# Altium PCB LTE_GPS_433_V1.0.PcbDoc (part 1 of 2)
Units mil, origin at the board's own origin, x right, y up, seen from the top; angles counter-clockwise.
Board outline 3937.01 x 2362.2 mil, 4 copper layers (Top Layer, GND, POWER, Bottom Layer); 259 components, 188 nets, 896 pads, 488 vias.
Unrouted connection lines stored in the file: 33.
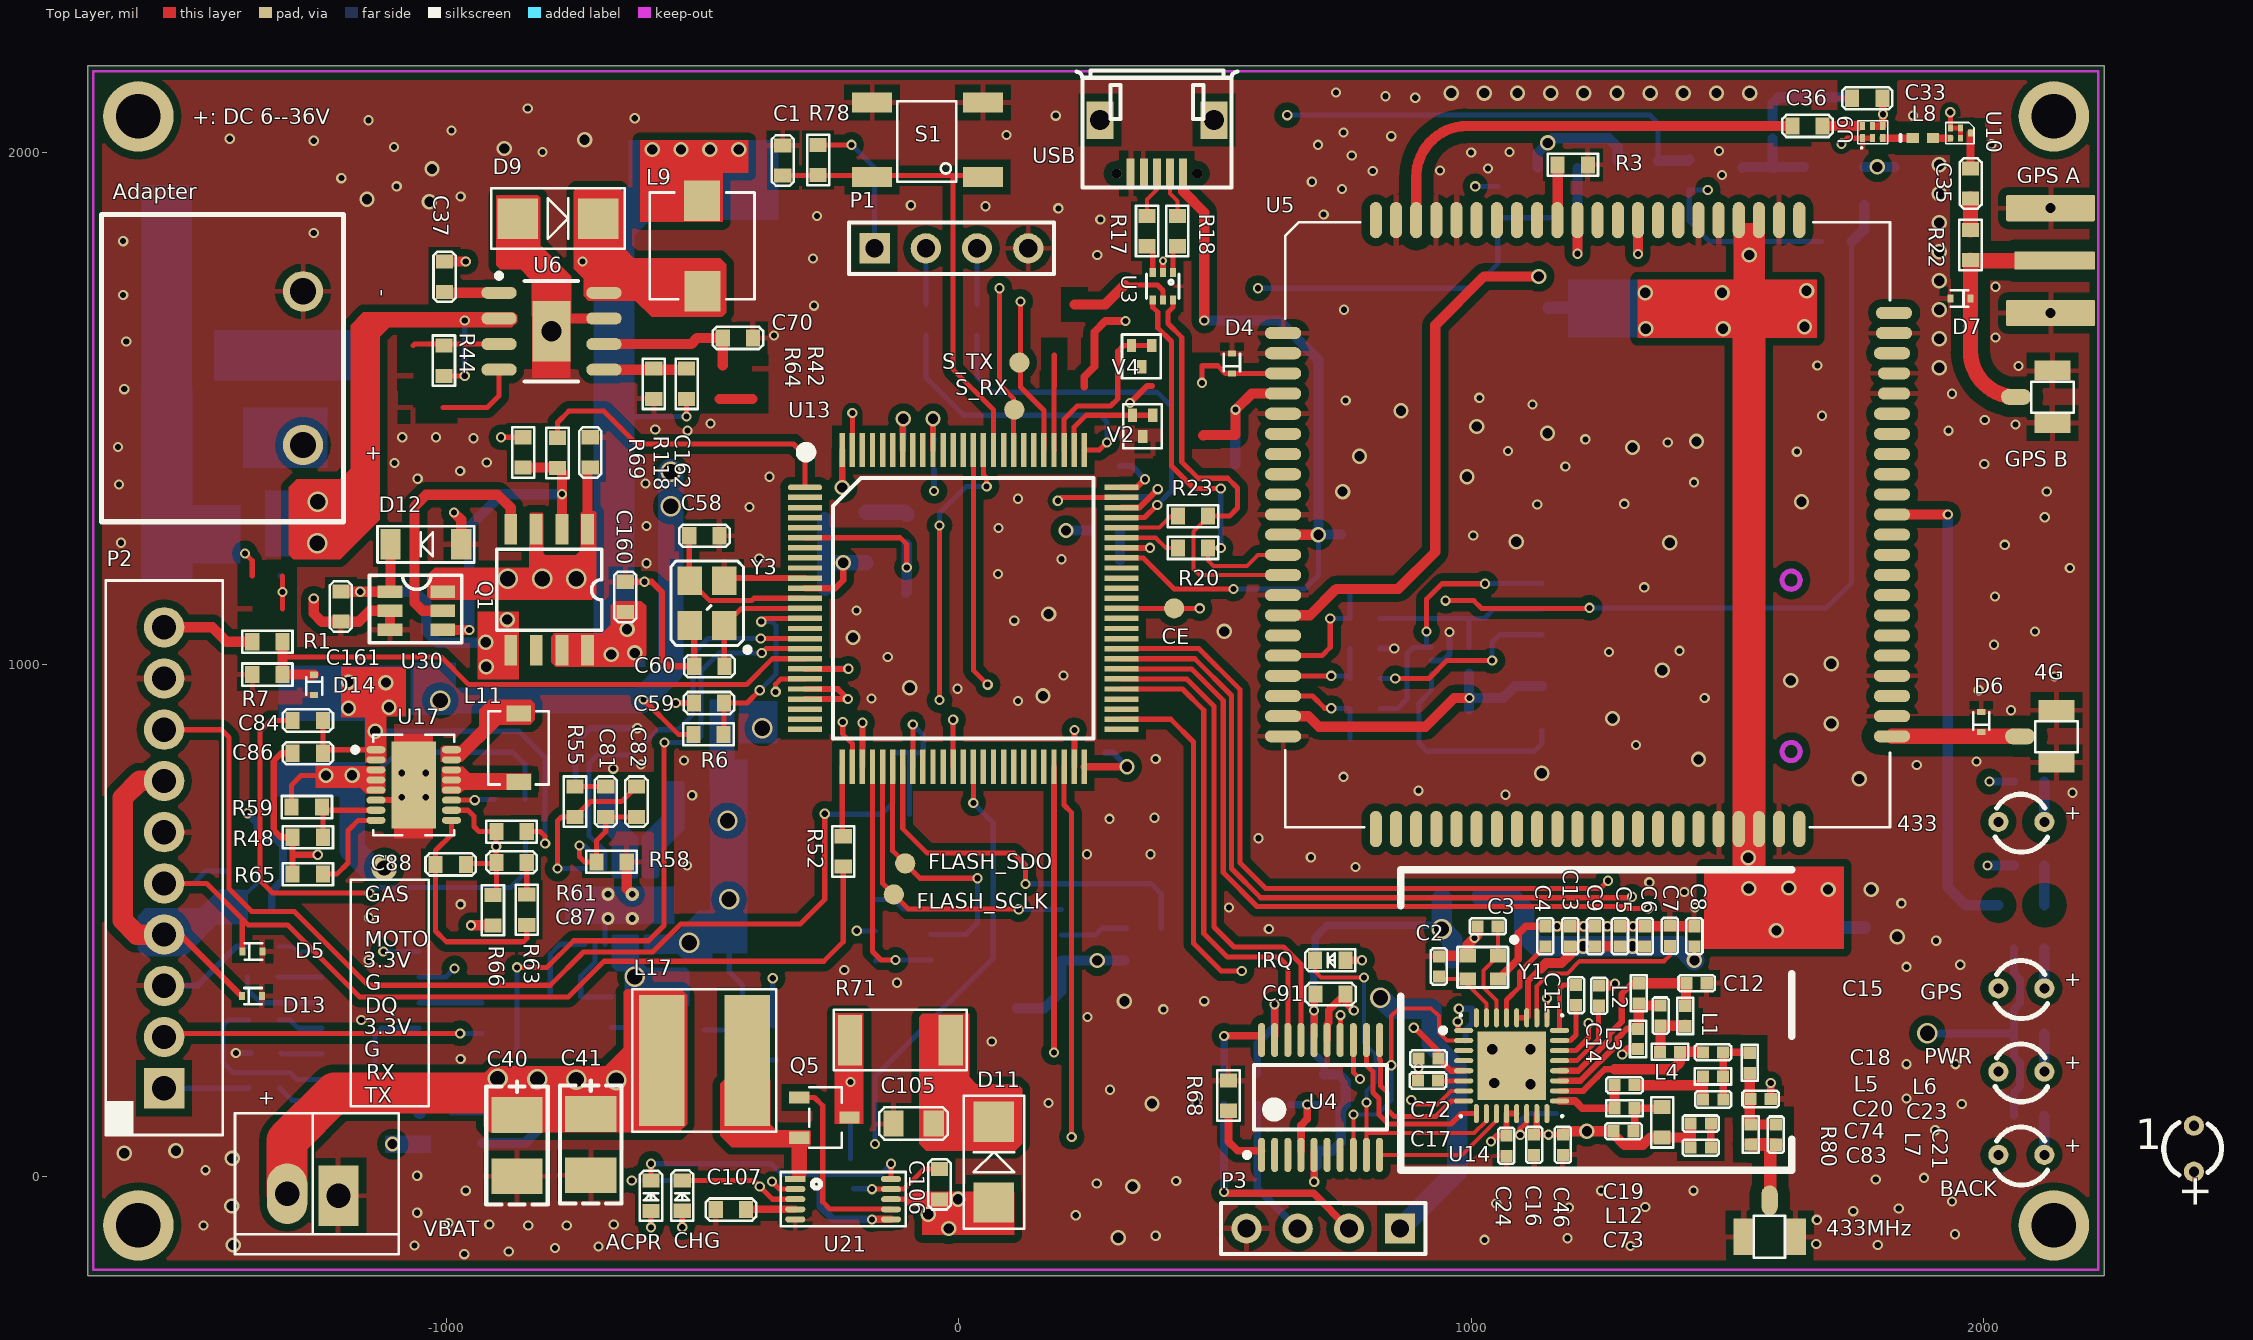
[diagram p0: Top Layer view]
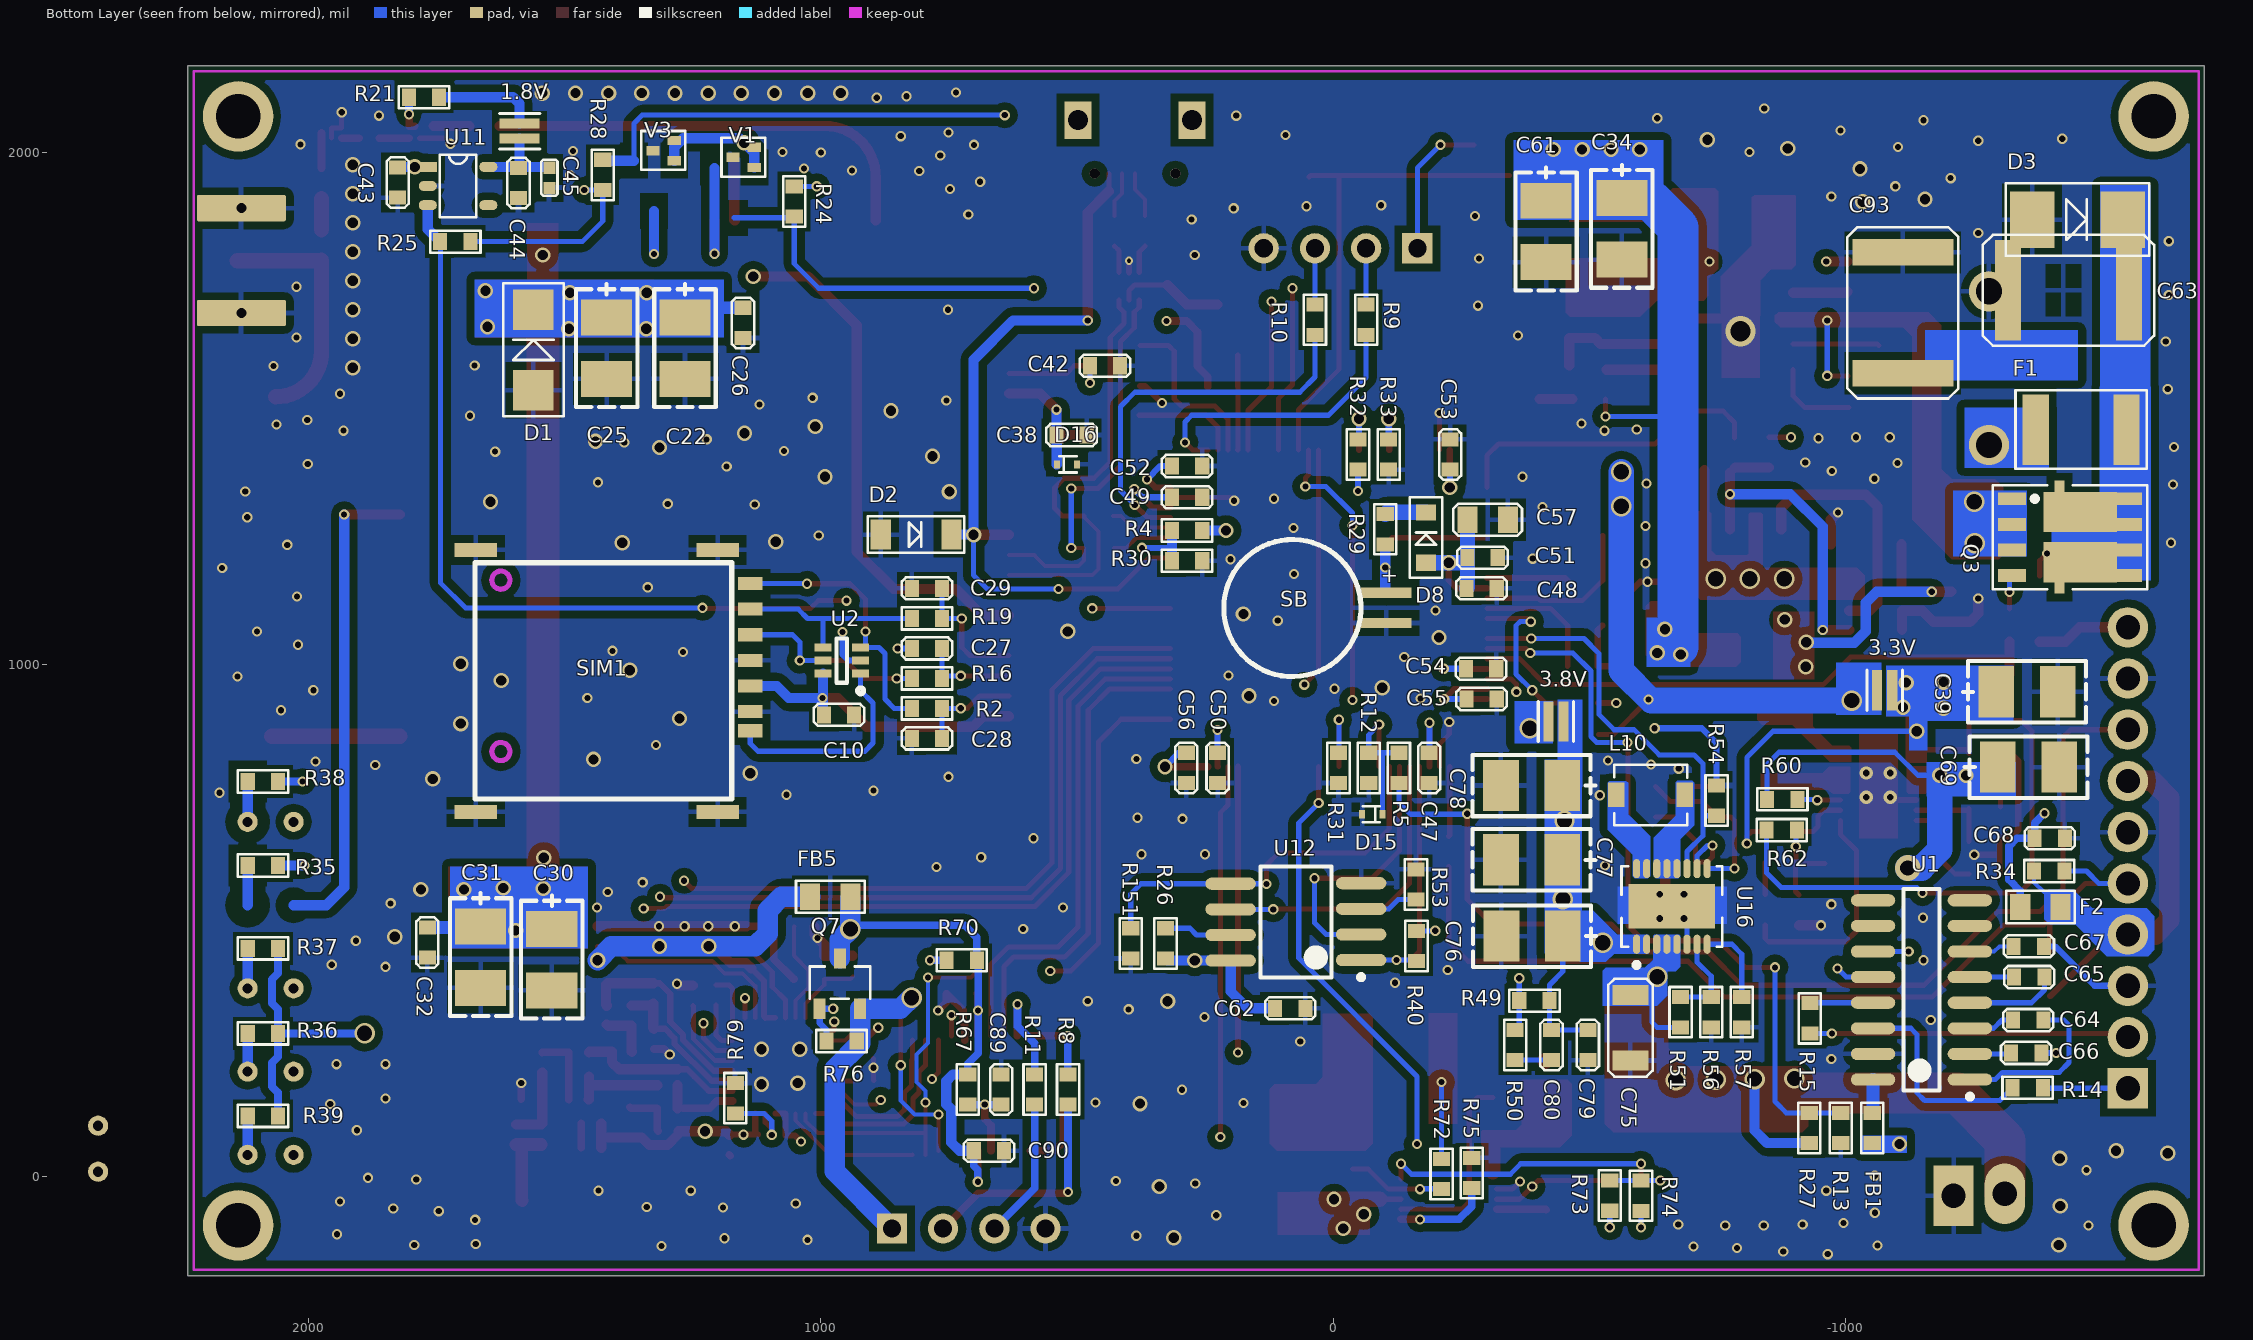
[diagram p1: Bottom Layer view, seen from below]
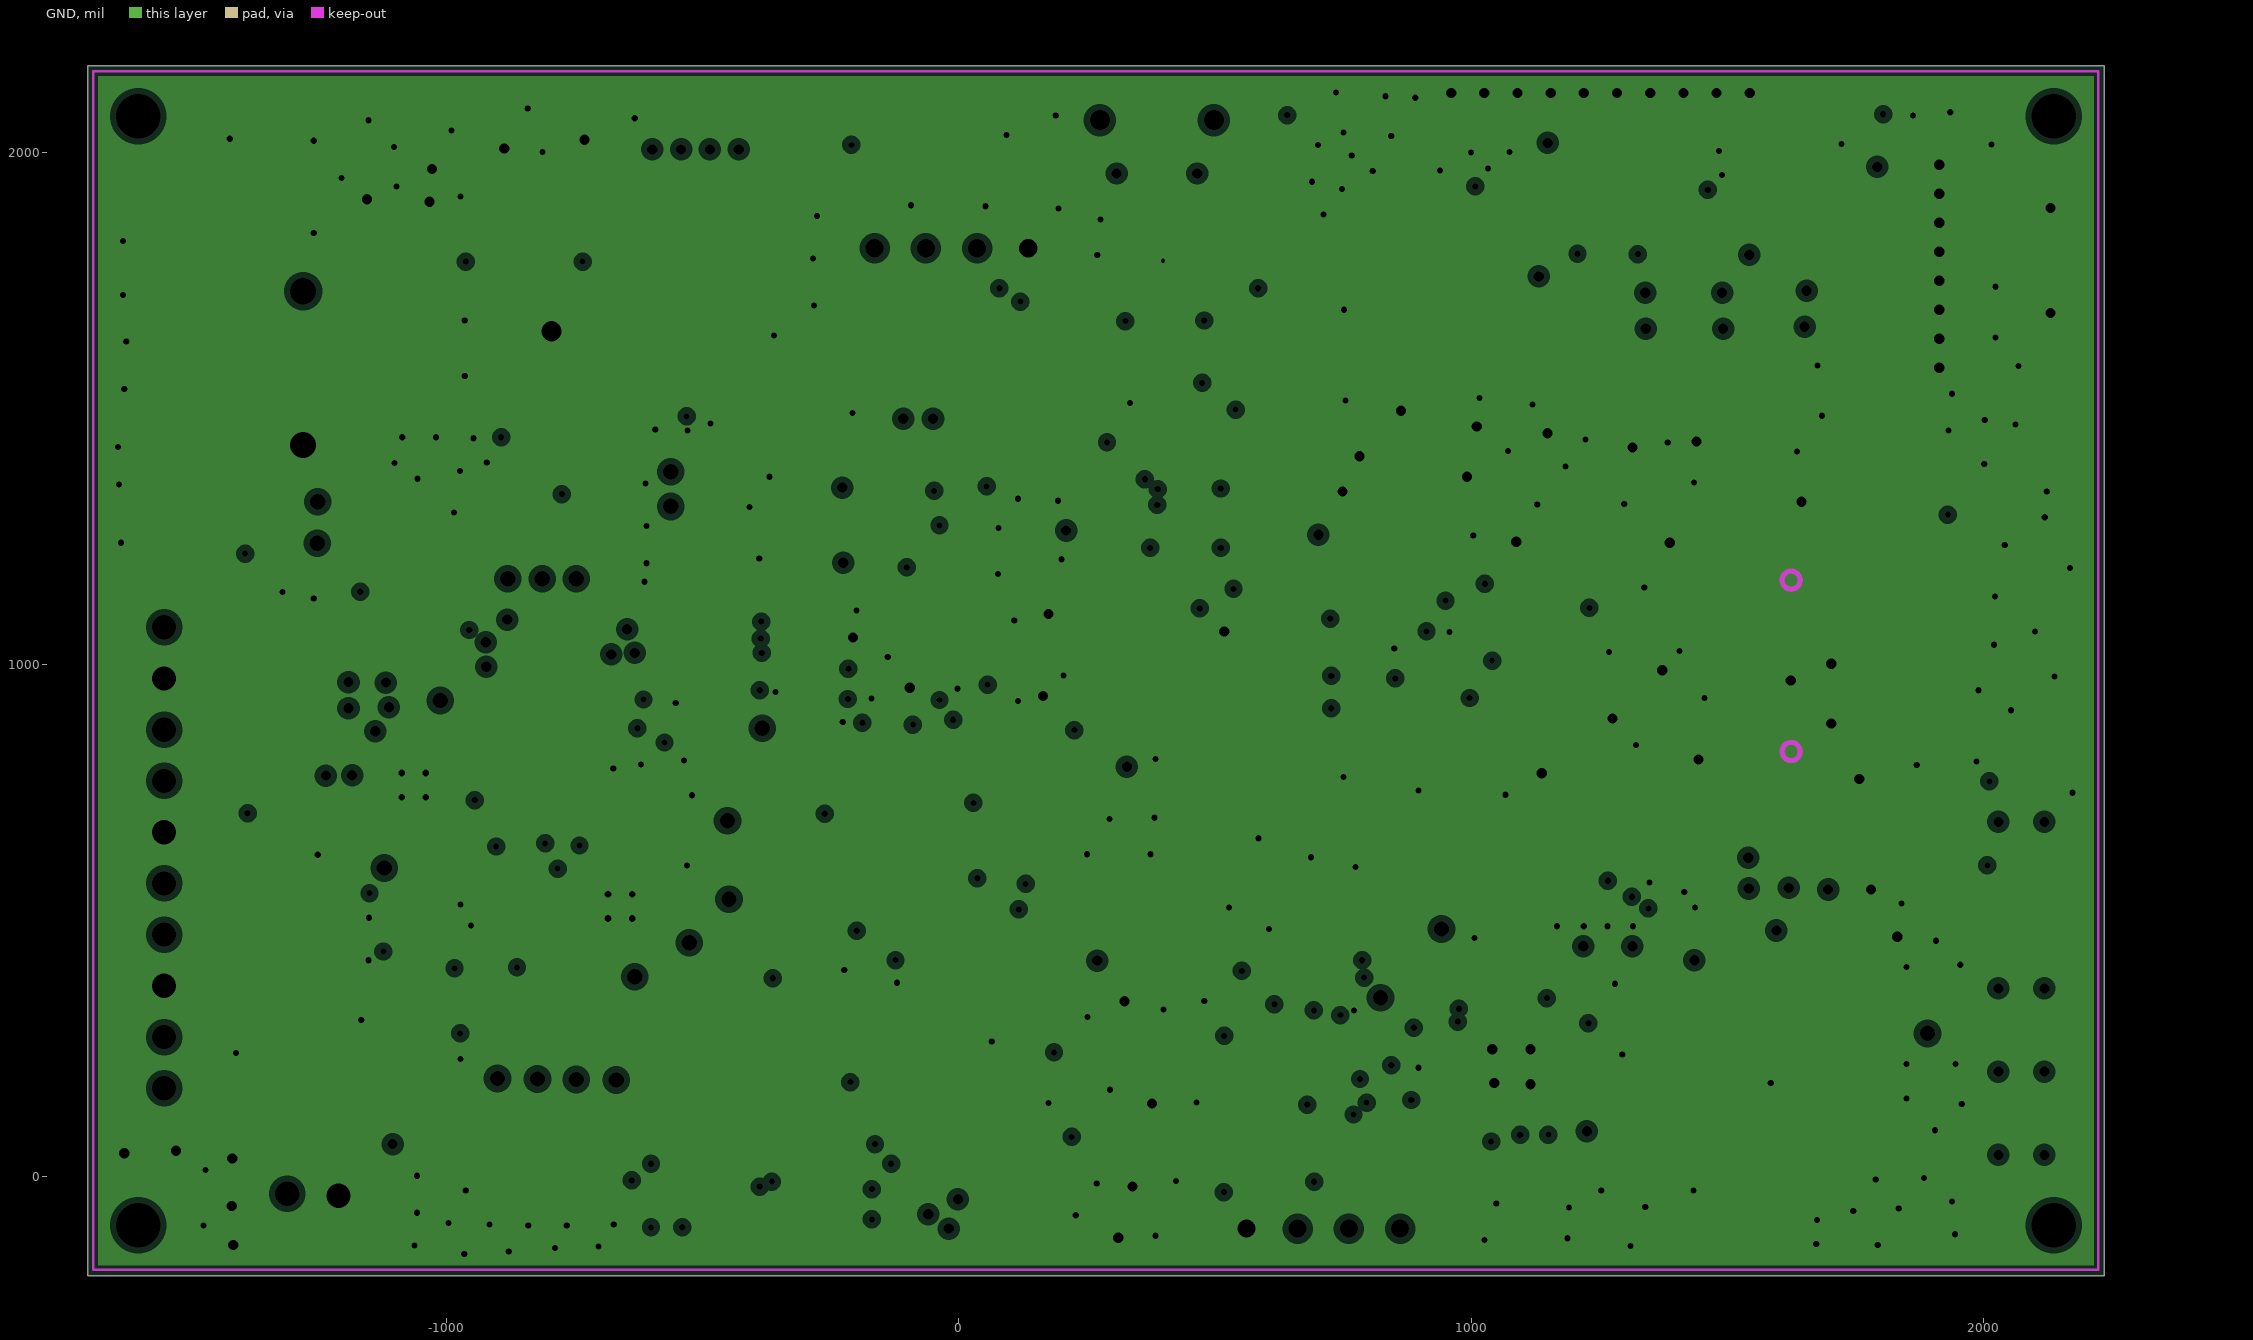
[diagram p2: GND, clearances drawn from the general rule]
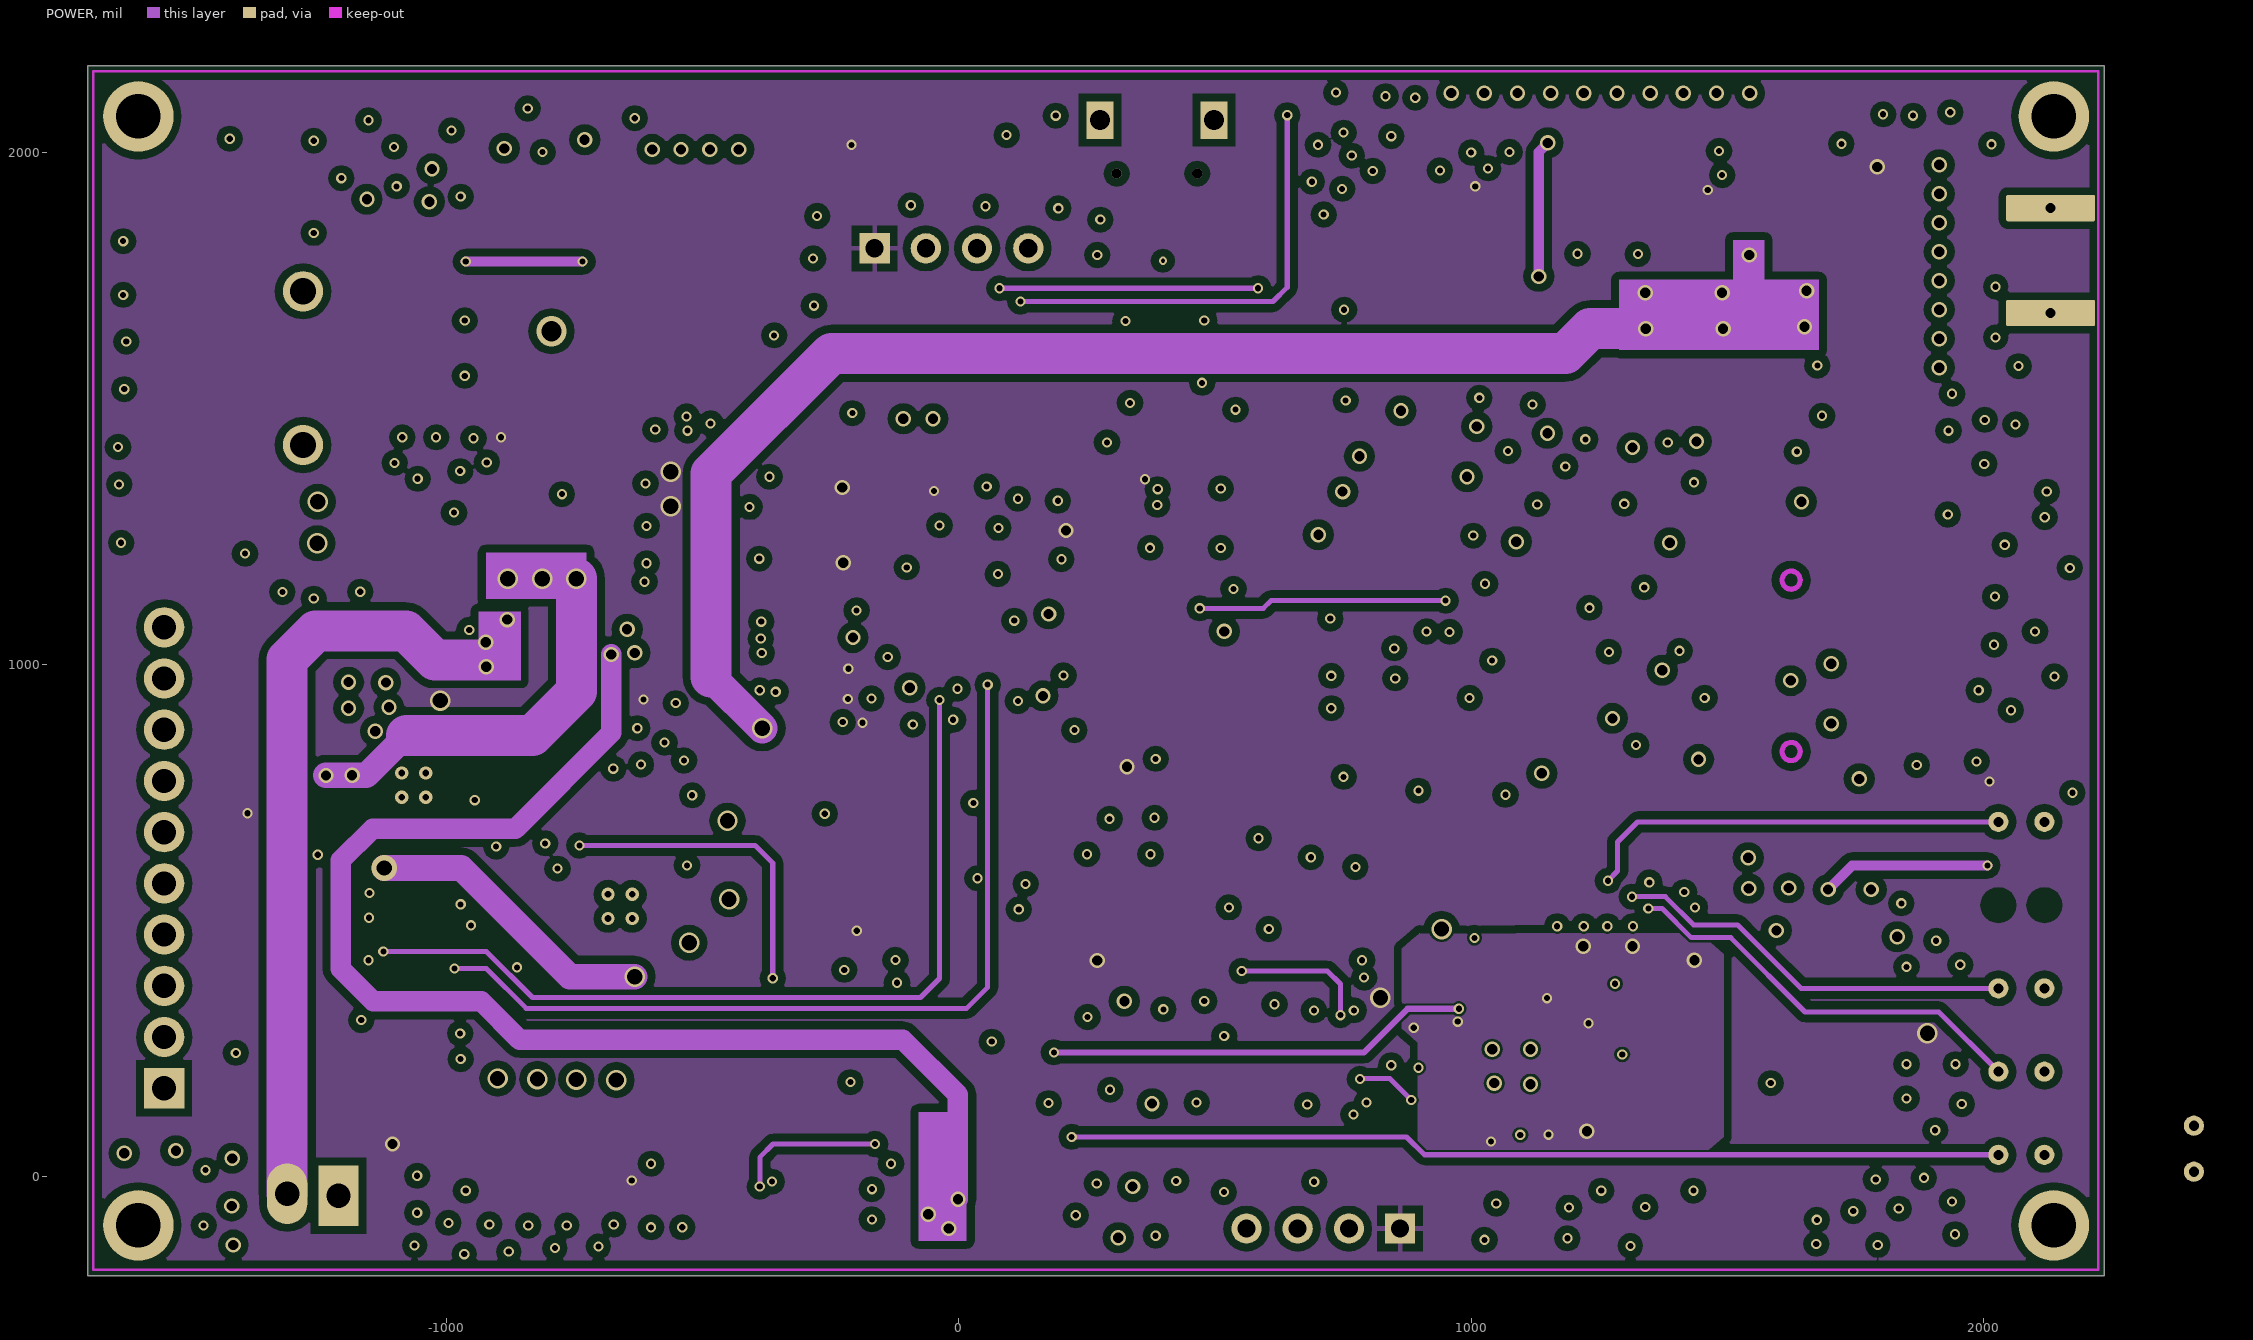
[diagram p3: POWER]

## Layer stack, top to bottom
Top Layer: signal copper 1.4
Dielectric: core 12.6, FR-4, Dk 4.8
GND: plane copper 1.4, net GND
Dielectric: prepreg 12.6, FR-4, Dk 4.8
POWER: signal copper 1.4
Dielectric: core 12.6, FR-4, Dk 4.8
Bottom Layer: signal copper 1.4

## Board outline
-1700.68,-193.2 -1700.68,2169 2236.32,2169 2236.32,-193.2

## Design rules (kind name [scope] priority, off if disabled: settings)
Clearance Clearance_2 [All] p1: gap=5
Clearance rf [InNetClass('RF')] p2: gap=23.62
Clearance Clearance_1 [InNet('VCC_MCU_3.3V')] p3: gap=15
Clearance [InPolygon And InNet(GND)] p4: gap=15
DiffPairsRouting [All] p1: maxlimit=10 minlimit=10 mostfreqgap=10 maxuncoupledlength=500
MinimumSolderMaskSliver [All] p1: minsoldermaskwidth=1
PlaneClearance [All] p1: clearance=12
PlaneConnect [All] p1: planeconnectstyle=Relief reliefexpansion=20 reliefentries=4 reliefconductorwidth=10 reliefairgap=10
PolygonConnect [IsVia] p1: connectstyle=Direct reliefconductorwidth=10 reliefentries=4 polygonreliefangle="90 Angle"
PolygonConnect PolygonConnect_1 [All] p2: connectstyle=Relief reliefconductorwidth=10 reliefentries=4 polygonreliefangle="90 Angle"
RoutingVias [All] p1: holewidth=28 width=50 viastyle="Through Hole" minholewidth=28 minwidth=50 maxholewidth=28 maxwidth=50
SilkToSilkClearance [All] p1: silktosilkclearance=1
SilkscreenOverComponentPads [All] p1: minsilkscreentomaskgap=0
SolderMaskExpansion [All] p1: expansion=4
Width [All] p1: maxlimit=200 minlimit=8 preferedwidth=10
22 further rules are at their usual default settings.

## Classes and differential pairs
component class RF_433MHz: 433MHz C2 C3 C4 C5 C6 C7 C8 C9 C11 C12 C13 C14 C15 C16 C17 C18 C19 C20 C21 C23 C24 C46 C72 C73 C74 C83 C89 C90 C91 D10 FB5 IRQ L1 L2 L3 L4 L5 L6 L7 L12 Q7 R67 R68 R70 R76 R79 R80 U4 U14 U15 Y1
component class POWER_IN: 3.3V 3.8V ACPR C34 C37 C39 C40 C41 C61 C63 C69 C70 C75 C76 C77 C78 C79 C80 C81 C82 C84 C86 C87 C88 C93 C105 C106 C107 C160 C161 C162 C? CHG D3 D9 D11 D12 D? F1 L9 L10 L11 L17 L? NET7 NET8 Q1 Q3 Q5 R13 R27 R42 R44 R48 R49 R50 R51 R54 R55 R56 R57 R58 R59 R60 R61 R62 R63 R64 R65 R66 R69 R71 R72 R73 R74 R75 R118 R? T7 T8 U6 U16 U17 U21 U30
component class MCU: 1 433 BACK C47 C48 C49 C50 C51 C52 C53 C54 C55 C56 C57 C58 C59 C60 C62 D8 FLASH_SCLK FLASH_SDO GPS PWR R4 R6 R20 R23 R26 R29 R30 R31 R32 R33 R35 R36 R37 R38 R39 R40 R52 R53 R151 SB U12 U13 Y3
component class LTE: 1.8V 3G_ANT 4G C10 C22 C25 C26 C27 C28 C29 C30 C31 C32 C33 C35 C36 C38 C42 C43 C44 C45 CE D1 D2 D4 D5 D6 D7 "GPS A" "GPS B" L8 R2 R3 R16 R19 R21 R22 R24 R25 R28 S_RX S_TX SIM1 T1 T3 T4 T5 U2 U5 U7 U8 U9 U10 U11 V1 V2 V3 V4
component class Interface: Adapter C1 C64 C65 C66 C67 C68 D5 D13 D14 D15 F2 FB1 P1 P2 P3 P6 R1 R5 R7 R8 R9 R10 R11 R12 R14 R15 R17 R18 R34 R78 S1 U1 U3 USB VBAT
differential pair USB_D: +USB_D_P -USB_D_N

## Components (designator, comment, footprint, x,y, rotation, side; value= is the part's Value field where it differs from the comment)
1 "LED0" LED_DIP_3mm 2411.32,10 r90 top
1.8V "TEST_P" "TP_High PWR" 1588.32,2027 r90 bottom (schematic designator T5)
3.3V "TEST_P" "TP_High PWR" -1092,950 r0 bottom (schematic designator T8)
3.8V "3.8V" "TP_High PWR" -450,889 r0 bottom (schematic designator T7)
4G "IPX" ECT8180001581 2072,860.1 r270 top
433 "LED0" LED_DIP_3mm 2119.32,693 r180 top (schematic designator NET5)
433MHz "IPX" ECT8180001581 1583,-46 r180 top (schematic designator U15)
ACPR "LED0" 0603LED -601.35,-66.45 r90 top (schematic designator NET8)
Adapter "Header 2" KF7.62-2P -1280.68,1729 r270 top (schematic designator P5)
BACK "BACK" LED_DIP_3mm 2119.32,43 r180 top (schematic designator NET6)
C1 "0.1uF/50V" 0603C -344,1955 r90 top
C2 "15pF/50V" 0402C 937,391 r90 top
C3 "15pF/50V" 0402C 1052,489 r180 top
C4 "47nF/50V" 0402C 1145,450 r90 top
C5 "47nF/50V" 0402C 1290.5,450 r90 top
C6 "47nF/50V" 0402C 1339,450 r90 top
C7 "47nF/50V" 0402C 1388,451 r90 top
C8 "47nF/50V" 0402C 1436,450 r90 top
C9 "47nF/50V" 0402C 1242,489.37 r270 top
C10 "0.1uF/6.3V" 0603C 935,902 r0 bottom
C11 "1.8nF/50V" 0402C 1205,335 r90 top
C12 "5.1pF/50V" 0402C 1460,378 r180 top
C13 "10nF/50V" 0402C 1193.5,450 r90 top
C14 "10nF/50V" 0402C 1250,334 r90 top
C15 "5.1pF/50V" 0402C 1370,295 r90 top
C16 "47nF/50V" 0402C 1123,43 r90 top
C17 "220nF/50V" 0402C 896,188 r0 top
C18 "5.1pF/50V" 0402C 1492,243 r180 top
C19 "39pF/50V" 0402C 1280,179 r0 top
C20 "2.2pF/50V" 0402C 1453,151 r0 top
C21 "2.2pF/50V" 0402C 1595,102 r270 top
C22 "100uF/10V" 1210E 1265.32,1618 r270 bottom
C23 "6.2pF/50V" 0402C 1585,152 r180 top
C24 "47nF/50V" 0402C 1068.75,41 r90 top
C25 "100uF/10V" 1210E 1418.32,1618 r270 bottom
C26 "1uF/50V" 0603C 1152,1697 r270 bottom
C27 "22pF/6.3V" 0603C 763.26,1031.8 r0 bottom
C28 "22pF/6.3V" 0603C 763.26,856 r0 bottom
C29 "22pF/6.3V" 0603C 763.26,1149 r0 bottom
C30 "100uF/10V" 1210E 1525.32,424 r270 bottom
C31 "100uF/10V" 1210E 1664.32,429 r270 bottom
C32 "0.1uF/50V" 0603C 1768.32,487 r270 bottom
C33 "10pF" 0603C 1803,2106 r180 top
C34 "100uF/10V" 1210E -564,1851 r270 bottom
C35 "33pF" 0603C 1975.32,1910 r90 top
C36 "33pF" 0603C 1686.32,2052 r180 top
C37 "0.1uF/50V" 0603C -1004.42,1787 r270 top
C38 "0.1uF/6.3V" 0603C 540,1448.37 r180 bottom
C39 "100uF/10V" 1210E -1355,947 r180 bottom
C40 "100uF/10V" 1210E -863,61 r270 top
C41 "100uF/10V" 1210E -719,63 r270 top
C42 "0.1uF/6.3V" 0603C 474.74,1583.63 r180 bottom
C43 "1uF" 0603C 1826.32,1912 r90 bottom
C44 "10uF" 0603C 1590.32,1911 r90 bottom
C45 "1uF" 0402C 1530,1931 r90 bottom
C46 "47nF/50V" 0402C 1179,43 r90 top
C47 "103" 0603C -187.68,828 r270 bottom
C48 "105" 0603C -260.68,1149 r180 bottom
C49 "2.2uF/6.3V" 0603C 255.32,1327 r0 bottom
C50 "2.2uF/6.3V" 0603C 225.32,768.94 r90 bottom
C51 "0.1uF/6.3V" 0603C -321.68,1209 r0 bottom
C52 "0.1uF/6.3V" 0603C 255.32,1388 r0 bottom
C53 "0.1uF/6.3V" 0603C -228.68,1440 r270 bottom
C54 "0.1uF/6.3V" 0603C -318.68,992 r0 bottom
C55 "0.1uF/6.3V" 0603C -319.68,933 r0 bottom
C56 "0.1uF/6.3V" 0603C 286.32,768.94 r90 bottom
C57 "10uF/6.3V" 0805C -262.68,1283 r180 bottom
C58 "10pF/6.3V" 0603C -467.68,1251.81 r180 top
C59 "1uF/6.3V" 0603C -517.68,925 r0 top
C60 "10pF/6.3V" 0603C -517,997 r0 top
C61 "100uF/10V" 1210E -416,1846 r270 bottom
C62 "0.1uF/6.3V" 0603C 54,329 r0 bottom
C63 "100uF/50V" 2220C -1554,1731 r0 bottom
C64 "0.1uF/50V" 0603C -1387,306 r0 bottom
C65 "0.1uF/50V" 0603C -1389,390 r0 bottom
C66 "0.1uF/50V" 0603C -1324,242 r180 bottom
C67 "0.1uF/50V" 0603C -1329,450 r180 bottom
C68 "0.1uF/50V" 0603C -1429,661 r0 bottom
C69 "100uF/10V" 1210E -1358,800 r180 bottom
C70 "22nF/16V" 0603C -461.34,1638 r0 top
C72 "47nF/50V" 0402C 897,231 r0 top
C73 "47nF/50V" 0402C 1278,89 r0 top
C74 "10nF/50V" 0402C 1468,104 r180 top
C75 "68uF/16V" 1206C -580.68,355 r270 bottom
C76 "100uF/10V" 1210E -388.68,470 r0 bottom
C77 "100uF/10V" 1210E -387.68,619 r0 bottom
C78 "100uF/10V" 1210E -387.68,764 r0 bottom
C79 "1uF/16V" 0603C -497.68,287.06 r270 bottom
C80 "33pF/16V" 0603C -426.68,287.06 r270 bottom
C81 "680F/16V" 0603C -689.69,762 r270 top
C82 "10pF/16V" 0603C -629.69,762 r270 top
C83 "100pF/50V" 0402C 1468,57 r180 top
C84 "33pF/16V" 0603C -1242,891 r180 top
C86 "1uF/16V" 0603C -1242,827 r180 top
C87 "680pF/16V" 0603C -844,614 r180 top
C88 "10pF/16V" 0603C -1022,610 r0 top
C89 "0.1uF" 0603C 647.98,141 r90 bottom
C90 "0.1uF" 0603C 642.34,50.8 r0 bottom
C91 "0.1uF" 0603C 755,357 r180 top
C93 "100uF/50V" 2220C -1112.68,1569 r90 bottom
C105 "22uF/16V" 0805C -128,104 r0 top
C106 "0.47uF/16V" 0603C -38,15 r270 top
C107 "0.1uF/16V" 0603C -475,-64 r0 top
C160 "0.1uF" 0603C -651.68,1162 r270 top
C161 "0.1uF/6.3V" 0603C -1207,1084 r90 top
C162 "10uF" 0603C -720.03,1444 r270 top
CE "TP" TPD 420,1110 r0 top (schematic designator T4)
CHG "LED0" 0603LED -540.43,-66.22 r90 top (schematic designator NET7)
D1 "SMAJ5.0CA" SMA 1561.32,1535.84 r90 bottom
D2 "MMSZ5231BT1G" SOD123 883,1254 r180 bottom
D3 "TPSMB43A" SMB -1365,1869 r180 bottom
D4 "ESD9M5.0S-DTVS105" SOD923#1 533,1608 r90 top
D5 "ESD9M5.0S-DTVS105" SOD923#1 -1360,440 r0 top
D6 "ESD9L5" SOD923#2 1996,908 r90 top
D7 "ESD9L5" SOD923#2 1936,1715 r180 top
D8 "RB751V40T1" SOD323 -181.68,1199 r90 bottom
D9 "SS54" SMa -861.68,1871 r0 top
D11 "MBRA340T3G" SMA 68,-50 r90 top
D12 "MMSZ5231BT1G" SOD123 -972,1235 r180 top
D13 "ESD9B3.3ST5G" SOD923#1 -1361,353 r0 top
D14 "ESD9B3.3ST5G" SOD923#1 -1259,941 r270 top
D15 "ESD9B3.3ST5G" SOD923#1 -57,708 r0 bottom
D16 "ESD9M5.0S-DTVS105" SOD923#1 500,1391 r180 bottom
F1 "3A" 1812-F -1372,1459 r180 bottom
F2 "1A" 0805R -1342,527 r180 bottom
FB1 "" 0603R -1053,125 r270 bottom
FB5 "GZ2012D800TF" 0805CZ 1021,547 r180 bottom
FLASH_SCLK "TP" tpd -127.34,551.34 r90 top
FLASH_SDO "TP" tpd -104.93,611.93 r180 top
GPS "LED0" LED_DIP_3mm 2119.32,368 r180 top (schematic designator NET4)
"GPS A" "SMA/142-0711-821" "SMA END LAUNCH JACK RECEPTACLE SHORT" 2139.32,1789 r90 top (schematic designator 3G_ANT)
"GPS B" "IPX" ECT8180001581 2064.32,1523 r270 top (schematic designator U8)
IRQ "LED0" 0603LED 754.43,423 r180 top (schematic designator D10)
L1 "27nH/0402HP-27NXJL" 0402R 1418,334 r270 top
L2 "56nH/0402HP-56NXJL" 0402R 1327.35,378 r270 top
L3 "27nH/0402HP-27NXJL" 0402R 1326,289 r270 top
L4 "15nH/0402HP-15NXJL" 0402R 1408,244 r180 top
L5 "15nH/0402HP-15NXJL" 0402R 1492,196 r180 top
L6 "43nH/0402HP-43NXJL" 0402R 1544,203 r90 top
L7 "22nH/0402HP-22NXJL" 0402R 1546,63 r90 top
L8 "5.6nH" INDC1005AL 1882,2028 r0 top
L9 "SRP5030TA-5R6M" SRP5030T -501.68,1729 r90 top
L10 "IHLP1212BZER2R2M11" IHLP-1212BZ -553,746 r180 bottom
L11 "IHLP1212BZER2R2M11" IHLP-1212BZ -859.68,905 r270 top
L12 "56nH/0402HPH-R56XJL" 0402R 1280,134 r0 top
L17 "CDRH6D28-150NC" CDRH6D23 -580.68,227.05 r90 top
P1 "MHDR1X4" HDR1X4 -164.68,1813 r0 top
P2 "Header 10" 10*2.54MMW -1552,173 r90 top
P3 "MHDR1X4" HDR1X4 861.32,-101 r180 top
PWR "LED0" LED_DIP_3mm 2119.32,205.5 r180 top (schematic designator NET3)
Q1 "FDS9933" FDS9933 -725.68,1265 r270 top
Q3 "Si7370DP" "PowerPAK SO-8" -1326,1324 r180 bottom
Q5 "ZXM61P03FTA" SOT23-3 -312,155 r180 top
Q7 "ZXM61P03FTA" SOT23-3 1002.32,328.06 r270 bottom
R1 "20K/1%" 0603R -1321,1044.76 r180 top
R2 "10R/5%" 0603R 822.32,914.6 r180 bottom
R3 "4.7K" 0603R 1228,1976 r180 top
R4 "10K" 0603R 314.37,1262 r180 bottom
R5 "100K/1%" 0603R -128.69,828 r270 bottom
R6 "10K" 0603R -459.68,864 r180 top
R7 "20K/1%" 0603R -1380.06,980.64 r0 top
R8 "22R" 0603R 517.32,200.06 r270 bottom
R9 "22R" 0603R -64.68,1644 r90 bottom
R10 "22R" 0603R 35.32,1644 r90 bottom
R11 "22R" 0603R 582.65,200.06 r270 bottom
R12 "30K/1%" 0603R -69.68,768.94 r90 bottom
R13 "158K/1%" 0603R -991.5,65.94 r90 bottom
R14 "1K" 0603R -1386,174 r0 bottom
R15 "1K" 0603R -931,280 r90 bottom
R16 "10R/5%" 0603R 822.32,973.2 r180 bottom
R17 "22R" 0603R 367.32,1876 r270 top
R18 "22R" 0603R 426.32,1876 r270 top
R19 "10R/5%" 0603R 822.32,1090.4 r180 bottom
R20 "0" 0603R 427.32,1228 r0 top
R21 "10R/5%" 0603R 1804.32,2108 r180 bottom
R22 "0" 0603R 1975,1790 r90 top
R23 "0" 0603R 427.32,1290 r0 top
R24 "10K" 0603R 1052,1934 r270 bottom
R25 "10K" 0603R 1743.32,1826 r180 bottom
R26 "100K" 0603R 327,426.26 r90 bottom
R27 "158K/1%" 0603R -930,125 r270 bottom
R28 "10K" 0603R 1426,1986 r270 bottom
R29 "1K" 0603R -102,1294 r270 bottom
R30 "10K" 0603R 314.37,1203 r180 bottom
R31 "10K" 0603R -10.69,828 r270 bottom
R32 "10K" 0603R -48.68,1440 r270 bottom
R33 "10K" 0603R -108.68,1440 r270 bottom
R34 "4.7K" 0603R -1428,597 r0 bottom
R35 "1K" 0603R 2060,608 r0 bottom
R36 "1K" 0603R 2060,280 r0 bottom
R37 "1K" 0603R 2060,446 r0 bottom
R38 "1K" 0603R 2060,772 r0 bottom
R39 "1K" 0603R 2060,119 r0 bottom
R40 "100K" 0603R -163,421.32 r90 bottom
R42 "100K/1%" 0603R -531.8,1578 r270 top
R44 "84.5K" 0603R -1005.68,1564 r90 top
R48 "10K/NC" 0603R -1242,663 r180 top
R49 "665K/1%" 0603R -363.68,344 r180 bottom
R50 "10K/1%" 0603R -355.68,228 r90 bottom
R51 "1M" 0603R -678.69,291.94 r90 bottom
R52 "100" 0603R -226,665 r270 top
R53 "100K" 0603R -162,600.32 r270 bottom
R54 "10K" 0603R -749,705 r90 bottom
R55 "10K/1%" 0603R -749.68,762 r270 top
R56 "10K/NC" 0603R -738.43,351 r270 bottom
R57 "90.9K/1%" 0603R -798.18,351 r270 bottom
R58 "124K/1%" 0603R -648.68,615 r180 top
R59 "1M" 0603R -1303,722 r0 top
R60 "1M" 0603R -847.68,737 r180 bottom
R61 "715K/1%" 0603R -903.06,674 r0 top
R62 "10K/1%" 0603R -846.68,677 r180 bottom
R63 "10K/1%" 0603R -844,551 r270 top
R64 "17.8K/1%" 0603R -596.03,1578 r270 top
R65 "90.9K/1%" 0603R -1242,591 r180 top
R66 "158K/1%" 0603R -910,491 r90 top
R67 "10K" 0603R 713.31,200.06 r270 bottom
R68 "10K" 0603R 526.32,129 r90 top
R69 "1M" 0603R -851.03,1384.94 r90 top
R70 "1K" 0603R 695.37,423 r0 bottom
R71 "0.082/1/4W" 2010R -213,267 r0 top
R72 "4.7/1%" 0603R -212,35 r270 bottom
R73 "1K" 0603R -540.43,-7.16 r270 bottom
R74 "1K" 0603R -601.35,-7.39 r270 bottom
R75 "19.6K" 0603R -271,37 r270 bottom
R76 "10K" 0603R 989,265 r180 bottom
R78 "10K" 0603R -275,2015 r270 top
R79 "56K/1%" 0603R 1167,124 r90 bottom
R80 "56K/1%" 0603R 1373,136 r270 top
R118 "0" 0603R -784,1384 r90 top
R151 "100K" 0603R 395,485.32 r270 bottom
S1 "SW-PB" KEY_SMT_4*4 -169.68,1952 r90 top
S_RX "TP" TPD 108,1498 r0 top (schematic designator T1)
S_TX "TP" TPD 118,1590 r0 top (schematic designator T3)
SB "SBatery" MS621FE -103.68,1111 r180 bottom
SIM1 "nano sim" "Nano SIM" 1138,871 r270 bottom
U1 "MAX3232ESE+" SOIC127P600X265-16N -1149,365 r0 bottom
U2 "SMF05C" SC70-6L 959.32,1008 r0 bottom
U3 "NUF2042XV6T1" SOT563-6 398.32,1739 r180 top
U4 "STM32F042F6P6" SOP65P640X265-20N 706,155 r90 top
U5 "SIM7600CE" SIM7600CE 853.32,679 r0 top
U6 "LMR14050SDDA" SOP127P600X168_HS-8N -795.68,1651 r0 top
U9 "BGU7005" BGU7005 1764.32,2028 r0 top
U10 "SAFEA1G58KA0F00R15" SAFEA1G58KA0F00R15 1975,2038 r180 top
U11 "XC6204-30" SOT23-5(DBV) 1767.42,1972 r180 bottom
U12 "M25P32-VMW6" SOIC127P790X216-8N 68,497.32 r0 bottom
U13 "STM32F427VIT6" LQFQ100-stm32f103v 8.32,1110 r0 top
U14 "CC1121RHB" QFN50P500X500X80-32N 1079,217 r0 top
U16 "LTC3113IDHD#PBF" QFN50P400X500X80-16N -661.68,528 r90 bottom
U17 "LTC3113IDHD#PBF" QFN50P400X500X80-16N -1064.68,765 r0 top
U21 "LTC1732-4.2" MSOP-10 -319.68,-4.35 r0 top
U30 "LTC4412ES6" TSOT-23 -1110.68,1143 r0 top
USB "Header 5" USB-MICRO-5P-2 335.32,1959 r0 top
V1 "SI2306" SC-89 1130,1971 r90 bottom
V2 "SI2306" SC-89 378.32,1487 r180 top
V3 "SI2306" SC-89 1286.32,1984 r90 bottom
V4 "SI2306" SC-89 376.32,1623 r180 top
VBAT "Header 2" 2X2.54MM -1211.68,-37 r180 top (schematic designator P6)
Y1 "TZ1430A" OSCILLATOR-2.5X2.0 1023,409 r180 top
Y3 "25MHz" OSCILLATOR-3.2X2.5 -491.68,1119.81 r90 top

## Footprints (in the part's own frame and the unit in brackets; to place one, negate y for a bottom-side part, rotate by r counter-clockwise, add the part's x,y. Pads: shape width x height; smd on the part's side, far side on the other; paste and mask are expansions set on the pad)
2X2.54MM [mm]
  rect 2x3 hole 1.2: 1(0,0)
  oval 2x3 hole 1.2: 2(2.54,-0.1)
  silkscreen extent -3,-4.1 5.13,2.9
10*2.54MMW [mm]
  rect 2x2 hole 1.2: 1(0,0)
  round 2 hole 1.2: 2(2.54,0) 3(5.08,0) 4(7.62,0) 5(10.16,0) 6(12.7,0) 7(15.24,0) 8(17.78,0) 9(20.32,0) 10(22.86,0)
  silkscreen extent -2.32,-2.9 25.18,2.9
0402C [mm]
  rect 0.6x0.6 smd: 1(0,0) 2(1,0)
  silkscreen extent -0.4,-0.4 1.4,0.4
0402R [mm]
  rect 0.6x0.6 smd: 1(0,0) 2(1,0)
  silkscreen extent -0.4,-0.4 1.4,0.4
0603C [mm]
  rect 0.7x0.85 smd: 1(0,0) 2(1.5,0)
  silkscreen extent -0.5,-0.55 2,0.55
0603LED [mm]
  rect 0.7x0.85 smd: 1(0,0) 2(1.5,0)
  silkscreen extent -0.5,-0.55 2,0.55
0603R [mm]
  rect 0.7x0.85 smd: 1(0,0) 2(1.5,0)
  silkscreen extent -0.5,-0.55 2,0.55
0805C [mm]
  rect 1x1.3 smd: 1(0,0) 2(2,0)
  silkscreen extent -0.7,-0.8 2.7,0.8
0805CZ [mm]
  rect 1x1.3 smd: 1(0,0) 2(2,0)
  silkscreen extent -0.7,-0.8 2.7,0.8
0805R [mm]
  rect 1x1.3 smd: 1(0,0) 2(2,0)
  silkscreen extent -0.7,-0.8 2.7,0.8
1206C [mm]
  rect 1x1.8 smd: 1(0,0) 2(3.25,0)
  silkscreen extent -0.8,-1.1 4.05,1.1
1210E [mil]
  rect 70x100 smd: 1(-60,0) 2(60,0)
  silkscreen extent -125,-60 115,60
1812-F [mm]
  rect 1.3x3.5 smd: 1(0,0) 2(4.5,0)
  silkscreen extent -1,-1.95 5.5,1.95
2010R [mm]
  rect 1.2x2.5 smd: 1(0,0) 2(5,0)
  silkscreen extent -0.8,-1.5 5.8,1.5
2220C [mm] "C"
  rect 1.3x5 smd: 1(0,0) 2(6,0)
  silkscreen extent -1.25,-2.75 7.25,2.75
BGU7005 [mm]
  rect 0.25x0.4 smd: 1(0,0) 2(0.5,0) 3(1,0) 4(1,0.6) 5(0.5,0.6) 6(0,0.6)
  silkscreen extent -0.25,-0.53 1.25,0.87
CDRH6D23 [mm]
  rect 6.5x2.26 smd: 1(0,0) 2(0,-4.25)
  silkscreen extent -3.53,-5.69 3.53,1.45
ECT8180001581 [mm]
  oval 0.8x1.5 smd: 1(0,0)
  rect 1x1.8 smd: 2(-1.3,1.8) 3(1.3,1.8)
  silkscreen extent -0.76,0.75 0.79,2.85
FDS9933 [mm]
  rect 1.5x0.635 smd: 1(0.015,0.008) 2(0.015,-1.262) 3(0.015,-2.532) 4(0.015,-3.802) 5(6.015,-3.802) 6(6.015,-2.532) 7(6.015,-1.262) 8(6.015,0.008)
  silkscreen extent 1.02,-4.49 5.02,0.71
HDR1X4 [mm] "Connector; Header; 4 Position"
  rect 1.5x1.5 hole 0.9: 1(0,0)
  round 1.5 hole 0.9: 2(2.54,0) 3(5.08,0) 4(7.62,0)
  silkscreen extent -1.27,-1.27 8.89,1.27
IHLP-1212BZ [mm]
  rect 0.8x1.2 smd: 1(0,0) 2(3.4,0)
  silkscreen extent -0.1,-1.5 3.53,1.5
INDC1005AL [mm] "Chip Inductor, Body 1.0x0.5mm, IPC High Density"
  rect 0.6x0.5 smd: 1(-0.5,0) 2(0.5,0)
  silkscreen extent -1.1,-0.15 -1.1,0.15, body extent -0.55,-0.3 0.55,0.3, height 0.55
KEY_SMT_4*4 [mm]
  rect 1x2 smd: 1(0,0) 1(0,-5.5) 2(3.7,-5.5) 2(3.7,0)
  silkscreen extent -0.23,-4.17 3.76,-1.24
KF7.62-2P [mm]
  round 2 hole 1.3: 1(0,0) 2(7.62,0)
  silkscreen extent -3.81,-10 11.43,2
LED_DIP_3mm [mm]
  round 1 hole 0.5: 1(0,0) 2(2.28,0)
  silkscreen extent -0.16,-1.37 2.44,1.5
LQFQ100-stm32f103v [mm]
  oval 1.7x0.27 smd: 1(-7.85,6)
  rect 1.7x0.27 smd: 2(-7.85,5.5) 3(-7.85,5) 4(-7.85,4.5) 5(-7.85,4) 6(-7.85,3.5) 7(-7.85,3) 8(-7.85,2.5) 9(-7.85,2) 10(-7.85,1.5) 11(-7.85,1) 12(-7.85,0.5) 13(-7.85,0) 14(-7.85,-0.5) 15(-7.85,-1) 16(-7.85,-1.5) 17(-7.85,-2) 18(-7.85,-2.5) 19(-7.85,-3) 20(-7.85,-3.5) 21(-7.85,-4) 22(-7.85,-4.5) 23(-7.85,-5) 24(-7.85,-5.5) 25(-7.85,-6) 51(7.85,-6) 52(7.85,-5.5) 53(7.85,-5) 54(7.85,-4.5) 55(7.85,-4) 56(7.85,-3.5) 57(7.85,-3) 58(7.85,-2.5) 59(7.85,-2) 60(7.85,-1.5) 61(7.85,-1) 62(7.85,-0.5) 63(7.85,0) 64(7.85,0.5) 65(7.85,1) 66(7.85,1.5) 67(7.85,2) 68(7.85,2.5) 69(7.85,3) 70(7.85,3.5) 71(7.85,4) 72(7.85,4.5) 73(7.85,5) 74(7.85,5.5) 75(7.85,6)
  rect 0.27x1.7 smd: 26(-6,-7.85) 27(-5.5,-7.85) 28(-5,-7.85) 29(-4.5,-7.85) 30(-4,-7.85) 31(-3.5,-7.85) 32(-3,-7.85) 33(-2.5,-7.85) 34(-2,-7.85) 35(-1.5,-7.85) 36(-1,-7.85) 37(-0.5,-7.85) 38(0,-7.85) 39(0.5,-7.85) 40(1,-7.85) 41(1.5,-7.85) 42(2,-7.85) 43(2.5,-7.85) 44(3,-7.85) 45(3.5,-7.85) 46(4,-7.85) 47(4.5,-7.85) 48(5,-7.85) 49(5.5,-7.85) 50(6,-7.85) 76(6,7.85) 77(5.5,7.85) 78(5,7.85) 79(4.5,7.85) 80(4,7.85) 81(3.5,7.85) 82(3,7.85) 83(2.5,7.85) 84(2,7.85) 85(1.5,7.85) 86(1,7.85) 87(0.5,7.85) 88(0,7.85) 89(-0.5,7.85) 90(-1,7.85) 91(-1.5,7.85) 92(-2,7.85) 93(-2.5,7.85) 94(-3,7.85) 95(-3.5,7.85) 96(-4,7.85) 97(-4.5,7.85) 98(-5,7.85) 99(-5.5,7.85) 100(-6,7.85)
  silkscreen extent -8.05,-6.46 6.46,8
MS621FE [mm]
  rect 2.5x0.5 smd: 1(0,-0.749) 2(0,0.749)
  silkscreen extent -8.05,-3.41 -1.25,3.39
MSOP-10 [mm]
  rect 1x0.3 smd: 1(0,0)
  oval 1x0.3 smd: 2(0,-0.5) 3(0,-1) 4(0,-1.5) 5(0,-2) 6(4.75,-2) 7(4.75,-1.5) 8(4.75,-1) 9(4.75,-0.5) 10(4.75,0)
  silkscreen extent -0.72,-2.35 5.47,0.35
"Nano SIM" [mm]
  rect 0.7x2.1 smd: 0(-8.97,-13.615) 0(-8.97,-1.615) 0(4.02,-13.615) 0(4.02,-1.615)
  rect 0.65x1.23 smd: 1(-2.22,0) 2(-4.76,0) 3(-7.3,0) 5(-0.95,0) 6(-3.49,0) 7(-6.03,0) 8(0,0)
  Keep-Out Layer circle w0.254: c-7.47,-12.365 r0.45
  Keep-Out Layer circle w0.254: c1.03,-12.365 r0.45
  silkscreen extent -8.33,-13.64 3.38,-0.91
OSCILLATOR-2.5X2.0 [mm] "OSCILLATOR-3.2X2.5"
  rect 0.8x0.65 smd: 1(-0.75,-0.575) 2(0.75,-0.575) 3(0.75,0.575) 4(-0.75,0.575)
  silkscreen extent -1.65,-1.47 1.25,1
OSCILLATOR-3.2X2.5 [mil] "OSCILLATOR-3.2X2.5"
  rect 56x48 smd: 1(-43.31,-33.46) 2(44,-33.46) 3(44,34) 4(-43.31,34)
  silkscreen extent -95,-83 83,71
"PowerPAK SO-8" [mm]
  rect 1.397x0.635 smd: 1(0,0) 2(0,-1.27) 3(0,-2.54) 4(0,-3.81) 5(5.75,-3.81) 6(5.75,-2.54) 7(5.75,-1.27) 8(5.75,0)
  rect 0.5x1.6 smd: 5(2.35,-3.905) 8(2.35,0.095)
  rect 3.66x2 smd: 5(3.375,-3.155) 8(3.375,-0.655)
  silkscreen extent -0.95,-4.48 6.7,0.67
QFN50P400X500X80-16N [mm] "QFN, 16-Leads, Body 5.0x4.0mm (max), Pitch 0.50mm, IPC Medium Density"
  oval 0.95x0.35 smd: 1(-1.875,1.75) 2(-1.875,1.25) 3(-1.875,0.75) 4(-1.875,0.25) 5(-1.875,-0.25) 6(-1.875,-0.75) 7(-1.875,-1.25) 8(-1.875,-1.75) 9(1.875,-1.75) 10(1.875,-1.25) 11(1.875,-0.75) 12(1.875,-0.25) 13(1.875,0.25) 14(1.875,0.75) 15(1.875,1.25) 16(1.875,1.75)
  rect 2.2x4.3 smd: 17(0,0)
  silkscreen extent -3.02,-2.5 2,2.5, body extent -2,-2.5 2,2.5, height 0.8
QFN50P500X500X80-32N [mm] "QFN, 32-Leads, Body 5.0x5.0mm (max), Pitch 0.50mm, IPC Medium Density"
  oval 0.95x0.25 smd: 1(-2.375,1.75) 2(-2.375,1.25) 3(-2.375,0.75) 4(-2.375,0.25) 5(-2.375,-0.25) 6(-2.375,-0.75) 7(-2.375,-1.25) 8(-2.375,-1.75) 17(2.375,-1.75) 18(2.375,-1.25) 19(2.375,-0.75) 20(2.375,-0.25) 21(2.375,0.25) 22(2.375,0.75) 23(2.375,1.25) 24(2.375,1.75)
  oval 0.25x0.95 smd: 9(-1.75,-2.375) 10(-1.25,-2.375) 11(-0.75,-2.375) 12(-0.25,-2.375) 13(0.25,-2.375) 14(0.75,-2.375) 15(1.25,-2.375) 16(1.75,-2.375) 25(1.75,2.375) 26(1.25,2.375) 27(0.75,2.375) 28(0.25,2.375) 29(-0.25,2.375) 30(-0.75,2.375) 31(-1.25,2.375) 32(-1.75,2.375)
  rect 3.4x3.4 smd: 33(0,0)
  silkscreen extent -3.52,-2.53 2.53,2.52, body extent -2.5,-2.5 2.5,2.5, height 0.8
SAFEA1G58KA0F00R15 [mm]
  rect 0.25x0.33 smd: 1(0,0) 2(0.5,-0.25) 3(1,-0.25) 4(1,0.25) 5(0.5,0.25)
  silkscreen extent -0.18,-0.53 1.22,0.53
SC70-6L [mm]
  rect 0.85x0.4 smd: 1(-0.925,0.65) 2(-0.925,0) 3(-0.925,-0.65) 4(0.925,-0.65) 5(0.925,0) 6(0.925,0.65)
  silkscreen extent -1.09,-1.1 0.25,1.65
SC-89 [mm]
  rect 0.46x0.65 smd: 1(0,0) 2(1,0) 3(0.5,1.05)
  silkscreen extent -0.46,-0.55 1.47,1.63
SIM7600CE [mm]
  oval 1.8x0.6 smd: 1(-5.6,24.6) 2(-5.6,23.6) 3(-5.6,22.6) 4(-5.6,21.6) 5(-5.6,20.6) 6(-5.6,19.6) 7(-5.6,18.6) 8(-5.6,17.6) 9(-5.6,16.6) 10(-5.6,15.6) 11(-5.6,14.6) 12(-5.6,13.6) 13(-5.6,12.6) 14(-5.6,11.6) 15(-5.6,10.6) 16(-5.6,9.6) 17(-5.6,8.6) 18(-5.6,7.6) 19(-5.6,6.6) 20(-5.6,5.6) 41(24.6,5.6) 42(24.6,6.6) 43(24.6,7.6) 44(24.6,8.6) 45(24.6,9.6) 46(24.6,10.6) 47(24.6,11.6) 48(24.6,12.6) 49(24.6,13.6) 50(24.6,14.6) 51(24.6,15.6) 52(24.6,16.6) 53(24.6,17.6) 54(24.6,18.6) 55(24.6,19.6) 56(24.6,20.6) 59(24.6,23.6) 60(24.7,24.6) 81(-5.6,4.6) 82(24.6,4.6) 85(24.7,25.6)
  oval 0.6x1.8 smd: 21(0,0) 22(1,0) 23(2,0) 24(3,0) 25(4,0) 26(5,0) 27(6,0) 28(7,0) 29(8,0) 30(9,0) 31(10,0) 32(11,0) 33(12,0) 34(13,0) 35(14,0) 36(15,0) 37(16,0) 38(17,0) 39(18,0) 40(19,0) 61(19,30.2) 62(18,30.2) 63(17,30.2) 64(16,30.2) 65(15,30.2) 66(14,30.2) 67(13,30.2) 68(12,30.2) 69(11,30.2) 70(10,30.2) 71(9,30.2) 72(8,30.2) 73(7,30.2) 74(6,30.2) 75(5,30.2) 76(4,30.2) 77(3,30.2) 78(2,30.2) 79(1,30.2) 80(0,30.2) 83(20,0) 84(-1,0) 86(-1,30.2) 87(20,30.2)
  oval 1.6x0.6 smd: 57(24.7,21.6) 58(24.7,22.6)
  silkscreen extent -5.5,0.1 24.5,30.1
SMA [mm]
  rect 2x2 smd: 1(0,0) 2(4,0)
  silkscreen extent -1.3,-1.5 5.3,1.5
SMa [mm]
  rect 2x2 smd: 1(0,0) 2(4,0)
  silkscreen extent -1.3,-1.5 5.3,1.5
"SMA END LAUNCH JACK RECEPTACLE SHORT" [mm] "SMA Connector - End Launch Jack Receptacle - Short"
  rrect10% 0.9x4 smd paste+0 mask+0.05: 1(0,0)
  rrect10% 1.3x4.4 hole 0.5 mask+0.05: 2(-2.6,0.2) 2(2.6,0.2)
  body extent -0.5,-2.05 0.5,2.05, height 8
SMB [mm]
  rect 2.2x2.8 smd: 1(0,0) 2(4.5,0)
  silkscreen extent -1.3,-1.8 5.8,1.8
SOD123 [mm]
  rect 1x1.5 smd: A(0,0) K(3.5,0)
  silkscreen extent -0.65,-0.9 4.15,0.9
SOD323 [mm]
  rect 0.8x1 smd: 1(0,0) 2(2.5,0)
  silkscreen extent -0.75,-0.8 3.25,0.8
SOD923#1 [mm]
  rect 0.3x0.4 smd: 1(0,0) 2(-1,0)
  silkscreen extent -0.88,-0.4 -0.02,0.4
SOD923#2 [mm]
  rect 0.3x0.4 smd: A(0,0) K(-1,0)
  silkscreen extent -0.88,-0.4 -0.02,0.4
SOIC127P600X265-16N [mm] "SOIC, 16-Leads, Body 10.0x4.0mm (max), Pitch 1.27mm, IPC Medium Density"
  oval 2.2x0.6 smd: 1(-2.4,4.445) 2(-2.4,3.175) 3(-2.4,1.905) 4(-2.4,0.635) 5(-2.4,-0.635) 6(-2.4,-1.905) 7(-2.4,-3.175) 8(-2.4,-4.445) 9(2.4,-4.445) 10(2.4,-3.175) 11(2.4,-1.905) 12(2.4,-0.635) 13(2.4,0.635) 14(2.4,1.905) 15(2.4,3.175) 16(2.4,4.445)
  silkscreen extent -2.52,-5 0.9,5.42, body extent -2,-5 2,5, height 2.65
SOIC127P790X216-8N [mm] "SOIC, 8-Leads, Body 5.5x5.5mm (max), Pitch 1.27mm, IPC Medium Density"
  oval 2.5x0.6 smd: 1(-3.121,1.88) 2(-3.121,0.61) 3(-3.121,-0.66) 4(-3.121,-1.93) 5(3.35,-1.905) 6(3.35,-0.635) 7(3.35,0.635) 8(3.35,1.905)
  silkscreen extent -3.25,-2.75 1.88,2.85, body extent -2.75,-2.75 2.74,2.75, height 2.16
SOP65P640X265-20N [mm] "SOP, 20-Leads, Body 6.6x4.5mm (max), Pitch 0.65mm, IPC Medium Density"
  oval 1.7x0.35 smd: 1(-2.85,2.925) 2(-2.85,2.275) 3(-2.85,1.625) 4(-2.85,0.975) 5(-2.85,0.325) 6(-2.85,-0.325) 7(-2.85,-0.975) 8(-2.85,-1.625) 9(-2.85,-2.275) 10(-2.85,-2.925) 11(2.85,-2.925) 12(2.85,-2.275) 13(2.85,-1.625) 14(2.85,-0.975) 15(2.85,-0.325) 16(2.85,0.325) 17(2.85,0.975) 18(2.85,1.625) 19(2.85,2.275) 20(2.85,2.925)
  silkscreen extent -2.97,-3.3 1.6,3.77, body extent -2.25,-3.3 2.25,3.3, height 2.65
SOP127P600X168_HS-8N [mm] "SOP, 8-Leads, Body 5.0x4.0mm (max), Pitch 1.27mm, IPC Medium Density"
  oval 1.75x0.6 smd: 1(-2.6,1.905) 2(-2.6,0.635) 3(-2.6,-0.635) 4(-2.6,-1.905) 5(2.6,-1.905) 6(2.6,-0.635) 7(2.6,0.635) 8(2.6,1.905)
  rect 1.9x3 smd: 9(0,0)
  silkscreen extent -2.72,-2.5 1.33,2.88, body extent -2,-2.5 2,2.5, height 1.68
SOT23-3 [mm]
  rect 1x0.6 smd: 1(0,0) 2(0,2) 3(-2.5,1)
  silkscreen extent -2.1,-0.5 -0.5,2.5
SOT23-5(DBV) [mm]
  rect 0.9x0.5 smd: 1(0,0)
  oval 0.9x0.5 smd: 2(0,-0.95) 3(0,-1.9) 4(3,-1.9) 5(3,0)
  silkscreen extent 0.6,-2.5 2.4,0.6
SOT563-6 [mil] "SOT563-6"
  rect 12x18 smd: 1(-19.69,-26.57) 2(0,-26.57) 3(20,-26.57) 4(20,27) 5(0,27) 6(-19.69,27)
  silkscreen extent -31,-24 32,24
SRP5030T [mm]
  rect 2x1.8 smd: 1(0,-0.025) 2(4.5,0)
  silkscreen extent -0.4,-2.6 4.9,2.6
"TP_High PWR" [mm]
  rect 0.5x2 smd: 1(0,0) 2(0.75,0)
  silkscreen extent -0.5,-1 1.25,1
TPD [mm]
  round 1 smd: 1(0,0)
tpd [mm]
  round 1 smd: 1(0,0)
TSOT-23 [mm]
  rect 1.22x0.62 smd: 1(-0.007,-0.012) 2(-0.007,-0.962) 3(-0.007,-1.912) 4(2.613,-1.912) 5(2.613,-0.962) 6(2.613,-0.012)
  silkscreen extent -1.02,-2.55 3.55,0.81
USB-MICRO-5P-2 [mm]
  round 0.5 hole 0.5: 0(-0.7,0) 0(3.3,0)
  rect 0.4x1.5 smd: 1(2.6,0) 2(1.95,0) 3(1.3,0) 4(0.65,0) 5(0,0)
  rect 1.35x1.85 hole 1: 6(4.125,2.65) 7(-1.525,2.65)
  silkscreen extent -2.7,-0.7 5.3,5.1

## Part data
1 433 ACPR CHG GPS IRQ PWR: "Typical INFRARED GaAs LED"
3.8V: library part TEST_P, "TEST_P"
4G 433MHz "GPS B": "MCU"
Adapter VBAT: "Header, 2-Pin"
BACK: library part LED0, "Typical INFRARED GaAs LED"
C1 C62 C64 C65 C66 C67 C68 C75 C79 C80 C81 C82 C84 C86 C87 C88 C90 C91 C105 C106 C107 C160 C161 C162: library part C, "C"
C2 C3 C4 C5 C6 C7 C8 C9 C11 C12 C13 C14 C15 C16 C17 C18 C19 C20 C21 C23 C24 C46 C72 C73 C74 C83: library part Cap, "Capacitor SMD"
C10 C26 C27 C28 C29 C32 C33 C35 C36 C38 C42 C47 C48 C49 C50 C51 C52 C53 C54 C55 C56 C57 C58 C59 C60: library part Cap, "Capacitor"
C22 C25 C30 C31: library part "Cap Pol2", "Polarized Capacitor (Axial)"
C34 C39 C40 C41 C61 C63 C69 C76 C77 C78 C93: library part "Cap Pol1", "Polarized Capacitor (Radial)"
C37 C70 C89: library part CAP, "Capacitor"
C43 C44 C45: library part C
D1 D8: library part Diode, "Default Diode"
D2 D6 D7 D12: library part "D Zener", "Zener Diode"
D3 D9 D11: library part "DIODE S", "Schottky Diode"
D13 D14 D15: library part ESD9M5.0S-DTVS105
F1 F2: library part "Fuse 1", "Fuse"
FB1: library part L_4, "L"
FB5: library part FB
"GPS A": library part SMA, "SMA Straight Connector"
L1 L2 L3 L4 L5 L6 L7 L12: library part Inductor, "Inductor SMD"
L8 L10 L11 L17: library part Inductor, "Inductor"
L9: library part INDUCTOR
P1 P3: "Header, 4-Pin"
P2: "Header, 10-Pin"
Q1: library part FDS4935
Q3: library part BSC070N1ONS3
Q5 Q7: library part MOSFET-P, "ZXM61P03F"
R1 R2 R3 R4 R5 R6 R7 R8 R9 R10 R11 R12 R13 R14 R15 R16 R17 R18 R19 R20 R21 R22 R23 R24 R25 R27 R28 R29 R30 R31 R32 R33 R34 R35 R36 R37 R38 R39 R52 R68 R70 R71 R72 R73 R74 R75 R76 R78 R79 R80: library part Res2, "Resistor"
R26 R40 R53 R151: library part Res1, "Resistor"
R42 R44 R48 R49 R50 R51 R54 R55 R56 R57 R58 R59 R60 R61 R62 R63 R64 R65 R66 R69 R118: library part R, "R"
R67: library part RES2
S1: "Switch"
U11: library part XC6204
U12: library part M25P16-VMN6TPBA
U13: library part STM32F407VGT6
U30: library part LTC4412
USB: "Header, 5-Pin"
V1 V2 V3 V4: library part NPN, "NPN Transistor"
Y1 Y3: library part XTAL3

## Free pads (board coordinates)
  round 137.8 hole 86.61: 0(-1602.26,2070.57) 1(2137.9,2070.57) 2(2137.9,-94.78) 3(-1602.26,-94.78)

## Via types
v1: diameter 20, hole 12, Top Layer to Bottom Layer, tented both sides, 347 vias
v2: diameter 30, hole 20, Top Layer to Bottom Layer, tented both sides, 110 vias
v3: diameter 40, hole 30, Top Layer to Bottom Layer, tented both sides, 20 vias
v4: diameter 25.98, hole 12.99, Top Layer to Bottom Layer, tented top, 8 vias
v5: diameter 16, hole 8, Top Layer to Bottom Layer, tented both sides, 1 vias
v6: diameter 50, hole 30, Top Layer to Bottom Layer, tented both sides, 1 vias
v7: diameter 59.06, hole 39.37, Top Layer to Bottom Layer, 1 vias

## Nets (pads, with @x,y where several pads share a name; then routed paths per layer and width w, separated by ;. In a path a pad name is that pad's centre, name@x,y a point inside that pad or via, vN(x,y) a via of type N, cw(c..) or ccw(c..) an arc to the next point about the centre after c; other vN are vias at no path point)
BATTERY_SUP: R13.2 R27.1 U13.17 | length 1491
  Top Layer w10: v1(-863,409) -804.18,409 -752.18,461 -737,461 -606,461 -576,491 v1@-576,848 ; -376.74,1031.26 U13.17@-300.74,1031.26
  Bottom Layer w10: R13.2@-991.5,125 R27.1@-930,125 -885,125 -863,147 v1(-863,409) ; v1(-575,848) -515,848 -503.5,859.5 -503.5,987.5 -468,1023 v1(-385,1023)
CHRG: U13.39 | length 1377.5
  Top Layer w10: -540.43,-7.16 -400.84,-7.16 v1(-388.89,-19.11) -364.28,-43.72 -319.68,-43.72 ; v1(28,730) U13.39@28,800.95
  POWER w10: v1(-388.89,-19.11) -388.89,38.11 -363,64 v1(-164,64)
  Bottom Layer w10: v1(-164,64) -164,196.05 67,427.05 67,691 v1(28,730)
COM0_RX: P2.2 R15.1 | length 623.9
  Top Layer w10: P2.2@-1552,273 -1545,280 v1(-974,280)
  Bottom Layer w10: v1(-974,280) R15.1@-931,280
COM0_TX: P2.1 R14.1 | length 166.4
  Bottom Layer w10: P2.1@-1552,173 -1387,173 R14.1@-1386,174
DQ: D5.2 P2.5 R34.1 R52.2 | length 1806.9
  Top Layer w10: P2.5@-1552,573 -1469,573 -1399.37,503.37 ; D5.2@-1399.37,440 -1399.37,503.37 ; R52.2@-226,605.94 -226,459 -264,421 -693,421 -763,351 -1170,351 -1311,492 -1388,492 -1399.37,503.37
  Bottom Layer w10: P2.5@-1552,573 -1495,573 -1471,597 R34.1@-1428,597
FLASH_NCS1: R40.1 U12.1 U13.29 | length 551.9
  Top Layer w10: -168.85,445.85 -168.85,476 ; U13.29@-168.85,800.95 -168.85,476 ; v1(-124,423.32) -152.32,423.32 -168.85,439.85 -168.85,476
  Bottom Layer w10: R40.1@-163,421.32 -161,423.32 v1(-124,423.32) U12.1@-54.89,423.32
FLASH_NW: R53.2 U12.3 | length 114.5
  Bottom Layer w10: R53.2@-162,541.26 -127.26,541.26 -109.32,523.32 U12.3@-54.89,523.32
FLASH_SCLK: FLASH_SCLK.1 U12.6 U13.30 | length 597.6
  Top Layer w10: U13.30@-149.16,800.95 -149.16,573.16 -99,523 v1@116.68,523
  Bottom Layer w10: v1(116.68,522.32) U12.6@199.89,522.32
FLASH_SDI: R151.1 U12.5 U13.32 | length 767.5
  Top Layer w10: U13.32@-109.8,800.95 -109.8,679.8 -62,632 107,632 130,609 v1(130,572)
  Bottom Layer w10: v1(130,572) 130.32,572.32 U12.5@199.89,572.32 374.68,572.32 395,552 R151.1@395,485.32
FLASH_SDO: FLASH_SDO.1 U12.2 U13.31 | length 539.4
  Top Layer w10: U13.31@-129.48,800.95 -129.48,636.48 FLASH_SDO.1@-104.93,611.93 -76,583 v1(36,583)
  Bottom Layer w10: U12.2@-54.89,473.32 13.32,473.32 36,496 v1(36,583)
GAS_SENSE: D14.2 R1.1 R7.2 U13.18 | length 1189.4
  Top Layer w10: -1321,1015 -1011,1015 -957,961 -415,961 -364.42,1011.57 U13.18@-300.74,1011.57
  Top Layer w20: R1.1@-1321,1044.76 -1321,1015 R7.2@-1321,980.64 D14.2@-1259.27,980.64
GND: 4G.2 4G.3 433MHz.2 433MHz.3 "GPS A.2" "GPS B.2" "GPS B.3" Adapter.2 C1.2 C2.2 C3.2 C4.2 C5.2 C6.2 C7.2 C8.2 C9.1 C10.1 C12.1 C13.2 C14.2 C16.1 C17.1 C22.2 C23.1 C24.1 C25.2 C26.2 C27.2 C28.2 C29.2 C30.2 C31.2 C32.2 C33.2 C34.2 C38.2 C39.2 C40.2 C41.2 C42.2 C43.1 C44.1 C45.1 C46.1 C47.2 C48.2 C49.1 C50.1 C51.1 C52.1 C53.1 C54.1 C55.1 C56.1 C57.2 C58.1 C59.1 C60.1 C61.2 C62.1 C63.2 C66.2 C67.2 C68.1 C69.2 C70.2 C72.1 C75.2 C76.2 C77.2 C78.2 C79.2 C86.2 C89.2 C90.1 C91.1 C93.2 C105.1 C107.1 C160.1 C161.1 C162.1 D1.1 D2.A D3.1 D4.1 D5.1 D6.A D7.A D9.1 D12.A D13.1 D14.1 D15.1 D16.1 L3.2 P1.4 P2.3 P2.6 P2.9 P3.4 Q3.4 R3.1 R7.1 R12.1 R13.1 R30.2 R31.2 R33.2 R44.1 R48.2 R53.1 R56.2 R57.2 R58.1 R64.2 R65.2 R66.1 R68.2 R75.1 R79.2 R151.2 S1.2 SB.1 SIM1.0 SIM1.5 SIM1.6 U1.15 U2.2 U3.2 U4.15 U5.1 U5.2 U5.5 U5.10 U5.14 U5.37 U5.40 U5.41 U5.43 U5.57 U5.58 U5.60 U5.61 U5.64 U5.65 U5.77 U5.78 U5.80 U5.81 U6.7 U6.9 U9.1 U9.2 U10.2 U10.3 U10.5 U11.2 U12.4 U13.10 U13.20 U13.27 U13.74 U13.99 U14.33 U16.6 U16.17 U17.6 U17.17 U21.5 U30.2 U30.3 USB.4 USB.5 V2.2 V4.2 VBAT.1 Y1.2 Y1.4 Y3.2 Y3.4 | length 3580.8
  Top Layer w10: -1321,1108.88 v1(-1321,1142) -1321,1173 ; R44.1@-1005.68,1564 v1(-965,1564) ; v1(-358,947) -358,962 -347.8,972.2 U13.20@-300.74,972.2 ; v1(-227,888) -227,864.36 -208.22,845.58 U13.27@-208.22,800.95 ; U13.99@-208.22,1419.05 v1(-208.22,1491.22) ; v1(193,1320) 199.53,1326.53 U13.74@317.37,1326.53 ; C17.1@896,188 897,189 C72.1@897,231 ; v1(1723,2017) 1734,2028 U9.1@1764.32,2028 U9.2@1784,2028 ; v1(1935.63,2078.63) U10.3@1935.63,2047.84 U10.2@1955.32,2047.84 U10.5@1955.32,2028.16
  Top Layer w12: R65.2@-1301.06,591 -1301.06,629 ; C86.2@-1301.06,827 -1323,827 -1338,812 -1338,677 -1324,663 R48.2@-1301.06,663 -1301.06,629 ; v1(-1252,629) -1301.06,629 ; U17.6@-1138.5,735.47 -1094.21,735.47 U17.17@-1064.68,765 ; C160.1@-651.68,1162 -600,1162 -580,1142 -580,1011 -566,997 C60.1@-517,997 -517,1067.82 Y3.4@-525.68,1076.5 ; v1(-553,925) C59.1@-517.68,925 ; Y3.2@-458.22,1163.81 -452.98,1169.05 U13.10@-300.74,1169.05 ; v1(334,1511) 367.26,1544.26 376.32,1544.26 ; U3.2@398.32,1765.57 v5(398.32,1788.68)
  Top Layer w15: U4.15@718.8,267.2 718.8,298 722.2,301.41 722.2,325.02 754.18,357 C91.1@755,357 755,341 v1(771,325) ; Y1.4@1052.53,386.36 1053.47,386.36 1092,424.89 1092,475 1106.37,489.37 C4.2@1145,489.37 ; C46.1@1177,41 C46.1@1179,43 ; v1(1295,239) 1305.63,249.63 L3.2@1326,249.63 ; C23.1@1585,152 v1(1585,183)
  Top Layer w20: v1(-1260,1129) -1260,1100 -1244,1084 C161.1@-1207,1084 -1172,1084 -1150.87,1105.13 U30.2@-1110.97,1105.13 U30.3@-1110.97,1067.73 ; v1(-986,1297) -972,1283 D12.A@-972,1235 ; v1(-953,491) R66.1@-910,491 ; v7(-795.68,1651) -770.68,1676 U6.7@-693.32,1676 ; R58.1@-648.68,615 -648.68,562.24 v4(-638.06,551.62) ; C2.2@938.27,431.64 Y1.2@993.47,431.64 993.47,453.47 1012.63,472.63 C3.2@1012.63,489 ; C4.2@1145,489.37 v1(1168,489.37) C13.2@1193.5,489.37 C9.1@1242,489.37 C5.2@1290.5,489.37 C6.2@1339,489.37 C8.2@1436,489.37 ; C14.2@1250,373.37 v1@1277.37,373.37
  Bottom Layer w10: Q3.4@-1326,1174 -1321,1169 v1(-1321,1142) ; v1(-965,1564) v1(-965,1672) ; U16.6@-691.21,454.18 U16.17@-691.21,498.47
  Bottom Layer w12: P2.3@-1552,373 -1487,373 -1410,450 C67.2@-1388.06,450 ; v1(-1412,242) C66.2@-1383.06,242 ; C27.2@822.32,1031.8 v1(849.8,1031.8) ; U2.2@922.9,1008 946,1008 958,1020 v1(958,1064)
  other v1: -966,-151 -879,-146 -789,-139 -704,-136 1311,-135 -1063,-134 1794,-133 1674,-131 1026,-123 1188,-120 384,-115 1945,-112 -1475,-95 -841,-95 -766,-95 -917,-93 -674,-93 -997,-90 1675,-84 228,-75 -1058,-70 1746,-67 1835,-62 1191,-60 1340,-59 1049,-52 1939,-48 -963,-27 1254,-27 1434,-27 269,-13 424,-8 1790,-5 1884,-2 -1058,2 -1471,13 1906,91 1958,142 175,144 464,145 1850,153 295,170 897,213 1850,220 1946,220 -973,230 64,264 -1167,306 251,312 399,327 479,343 1281,377 -121,379 -224,404 1850,410 1955,414 -1153,423 1908,461 1006.55,466.55 605,484 1220,489.37 1266,489.37 1316,489.37 -1152,506 527,526 1437,526 -973,532 1840,534 1416,556 1348,575 774,605 -531,608 687,624 250,630 374,630 585,661 294,699 382,701 -521,745 1067,746 2174,750 897,754 751,781 -675,797 1870,804 -621,805 1987,811 -537,813 384,816 1322,843 2054,911 115,929 -171,934 1456,935 1991,950 -3,953 2139,977 204,979 -139,1015 1269,1025 1407,1027 2021,1039 2101,1065 108,1086 -200,1106 2023,1133 1338,1151 -614,1162 76,1177 2169,1189 -610,1198 200,1206 -390,1207 2042,1234 -1636,1238 1004,1252 77,1267 -610,1271 2120,1288 -409,1308 1129,1313 1299,1314 115,1324 2124,1338 -1640,1352 -612,1354 1435,1356 -1057,1363 -370,1367 -974,1378 1184,1387 2002,1392 -1102,1394 -922,1395 1636,1416 1072,1417 -1642,1425 1384,1434 1223,1440 -948,1442 -1087,1444 -1021,1444 -530,1457 1932,1457 -593,1459 2063,1469 -485,1471 2003,1478 1685,1486 1120,1508 755,1516 1016,1521 1939,1529 -1630,1538 2069,1583 1676,1584 -1626,1631 2024,1639 -361,1643 752,1693 -283,1701 -1632,1722 2024,1738 -285,1793 270,1800 -1632,1827 -1260,1843 276,1869 -277,1876 712,1879 194,1891 52,1895 -94,1897 -973,1914 748,1929 -1098,1934 689,1943 -1206,1950 1490,1956 808,1964 939,1965 1033,1969 767,1994 1000,2000 -813,2001 1075,2001 1484,2003 -1103,2011 701,2015 2016,2016 -1260,2023 -1424,2027 844,2032 93,2034 751,2039 -991,2043 -1153,2063 -633,2067 189,2072 1863,2072 -842,2086 891,2107 833,2110 736,2117
  other v2: -1417,-133 311,-119 -1420,-57 339,-19 -1419,36 -1630,46 -1529,51 377,143 1116,181 1045,183 1041,249 1116,249 323,343 1832,469 1781,561 1758,777 1138,788 1444,815 1703,885 1276,895 164,939 -96,955 1624,969 1373,989 1703,1002 -207,1053 518,1065 175,1099 1388,1238 1088,1240 1645,1318 749,1338 992,1367 782,1407 1315,1424 1440,1436 1149,1452 1011,1465 863,1496 1914,1580 1914,1636.57 1914,1693.14 1914,1749.71 1914,1806.29 1914,1862.86 -1034,1904 -1156,1909 1914,1919.43 -1029,1968 1914,1976 -888,2008 -731,2025 961,2116 1025.78,2116 1090.56,2116 1155.33,2116 1220.11,2116 1284.89,2116 1349.67,2116 1414.44,2116 1479.22,2116 1544,2116
  other v4: -685.31,504.38 -638.06,504.38 -685.31,551.62 -1088.31,741.38 -1041.06,741.38 -1088.31,788.62 -1041.06,788.62
LED_433MHZ: 433.2 U13.59 | length 2191.4
  Top Layer w10: U13.59@317.37,1031.26 468.74,1031.26 549,951 549,613 599,563 1252,563 v1(1267,578)
  POWER w10: v1(1267,578) 1286,597 1286,654 1325,693 433.2@2029.55,693
LED_BACK: BACK.2 U13.48 | length 2553.1
  Top Layer w10: U13.48@205.16,800.95 205.16,725.84 220,711 v1(220,78)
  POWER w10: v1(220,78) 874,78 909,43 BACK.2@2029.55,43
LED_GPS: GPS.2 U13.58 | length 2178.4
  Top Layer w10: U13.58@317.37,1011.57 460.42,1011.57 532,940 532,602 589,545 1312,545 v1(1314,547)
  POWER w10: v1(1314,547) 1379,547 1434,492 1520,492 1644,368 GPS.2@2029.55,368
LED_PWR: PWR.2 U13.57 | length 2234.7
  Top Layer w10: U13.57@317.37,991.89 454.11,991.89 516,930 516,594 582,528 1301,528 1305,524 v1(1346,524)
  POWER w10: v1(1346,524) 1373,524 1430,467 1507,467 1652,322 1913.05,322 PWR.2@2029.55,205.5
LTE_GPS_ANTENA: C36.2 U5.79 | length 875.7
  Top Layer w20: U5.79@892.69,1867.98 892.69,1952 cw(c992.69,1952) 992.69,2052 C36.2@1627.26,2052
LTE_PWR: C42.1 D4.2 U5.3 V4.3 | length 231
  Top Layer w10: v1(474.74,1550.26) 474.74,1583.63 505.37,1583.63 520.24,1568.76 U5.3@632.84,1568.76
  Bottom Layer w10: v1(474.74,1550.26) C42.1@474.74,1583.63
LTE_PWR_EN: R54.2 U13.16 U16.11 | length 1054.9
  Top Layer w10: v1(-386.95,1050.95) U13.16@-300.74,1050.95
  Bottom Layer w10: -749,705 -727,705 -722.09,700.09 ; U16.11@-691.21,601.82 -691.21,635.21 -722.09,666.09 -722.09,700.09 ; v1(-386.95,1050.95) -490.05,1050.95 -519,1022 -519,903 -549,873 -588,873 -637,824 -705,824 -722.09,806.91 -722.09,700.09
  Bottom Layer w12: R54.2@-749,764.06 -749,847 -720,876 v1(-628,876)
LTE_RST: C38.1 D16.2 U5.4 V2.3 | length 325.4
  Top Layer w20: 476.74,1447.63 477.48,1448.37 540,1448.37 v1(540,1498) 571.39,1529.39 U5.4@632.84,1529.39
  Bottom Layer w20: D16.2@539.37,1391 C38.1@539.37,1447.74 ; C38.1@540,1448.37 v1(540,1498)
LTE_RXD: U5.68 V3.2 | length 150.2
  Top Layer w20: v1(1325.69,1801.69) 1325.69,1867.91 U5.68@1325.76,1867.98
  Bottom Layer w20: v1(1325.69,1801.69) 1325.69,1885.57
LTE_TXD: U5.71 V1.2 | length 232.7
  Top Layer w20: v1(1207.65,1802.35) U5.71@1207.65,1867.98
  Bottom Layer w20: v1(1207.65,1802.35) 1207.65,1969.41
MCU_433_SWCLK: R8.1 U4.20 | length 148.7
  Top Layer w15: v1(517.8,275.2) U4.20@591.16,275.2
  Bottom Layer w15: R8.1@517.32,200.06 517.8,200.54 v1(517.8,275.2)
MCU_433_SWDIO: R11.1 U4.19 | length 211.8
  Top Layer w15: U4.19@616.75,275.2 v1@616.75,336.25
  Bottom Layer w15: R11.1@582.65,200.06 582.65,260.35 616,293.7 v1(616,337)
MOTO_SENSE: D15.2 R5.1 R12.2 U13.33 | length 323.3
  Top Layer w10: U13.33@-90.11,800.95 v1(-90.11,883.11)
  Bottom Layer w10: R5.1@-128.69,828 R12.2@-69.68,828 -69.68,862.68 v1(-90.11,883.11) ; -96.42,826.58 D15.2@-96.37,708 D15.2@-96.37,708
Net1.8V_1: 1.8V.1 C44.2 C45.2 U11.5 | length 177.8
  Bottom Layer w20: C45.2@1530,1970.37 1531.63,1972 C44.2@1588.37,1972 ; 1.8V.1@1588.32,2027 1588.32,1972.06 C44.2@1588.37,1972 ; C44.2@1590.32,1970.06 C44.2@1588.37,1972 ; U11.5@1649.31,1972 C44.2@1588.37,1972
Net1_1: 1.1 R35.2
Net3.3V_1: 3.3V.1 C39.1 C84.1 C86.1 R61.2 U17.1 U17.2 | length 764.9
  Top Layer w10: C84.1@-1242,891 C86.1@-1242,827 -1235.1,833.9 U17.1@-1138.5,833.9 U17.2@-1138.5,814.21 ; R61.2@-844,674 -817,674 -808,665 v1(-808,651)
  Bottom Layer w10: v2(-1140,870) -859,870 -808,819 v1(-808,651)
  other v2: -1192,915 -1113,917 -1119,965 -1192,966
Net3.8V_1: 3.8V.1 C76.1 C77.1 C78.1 C79.1 C80.1 R49.2 U16.1 U16.2 | length 266.3
  Bottom Layer w10: C79.1@-497.68,287.06 C80.1@-426.68,287.06 -422.74,291 R49.2@-422.74,344 -422.74,374.74 -448.68,400.68 C76.1@-448.68,470
  other v3: -527,457 -449,542 -452,695
Net4G_1: 4G.1 D6.K U5.82 | length 250.2
  Top Layer w30: U5.82@1821.82,860.1 4G.1@2072,860.1